# Allegro board stm32f10x.brd
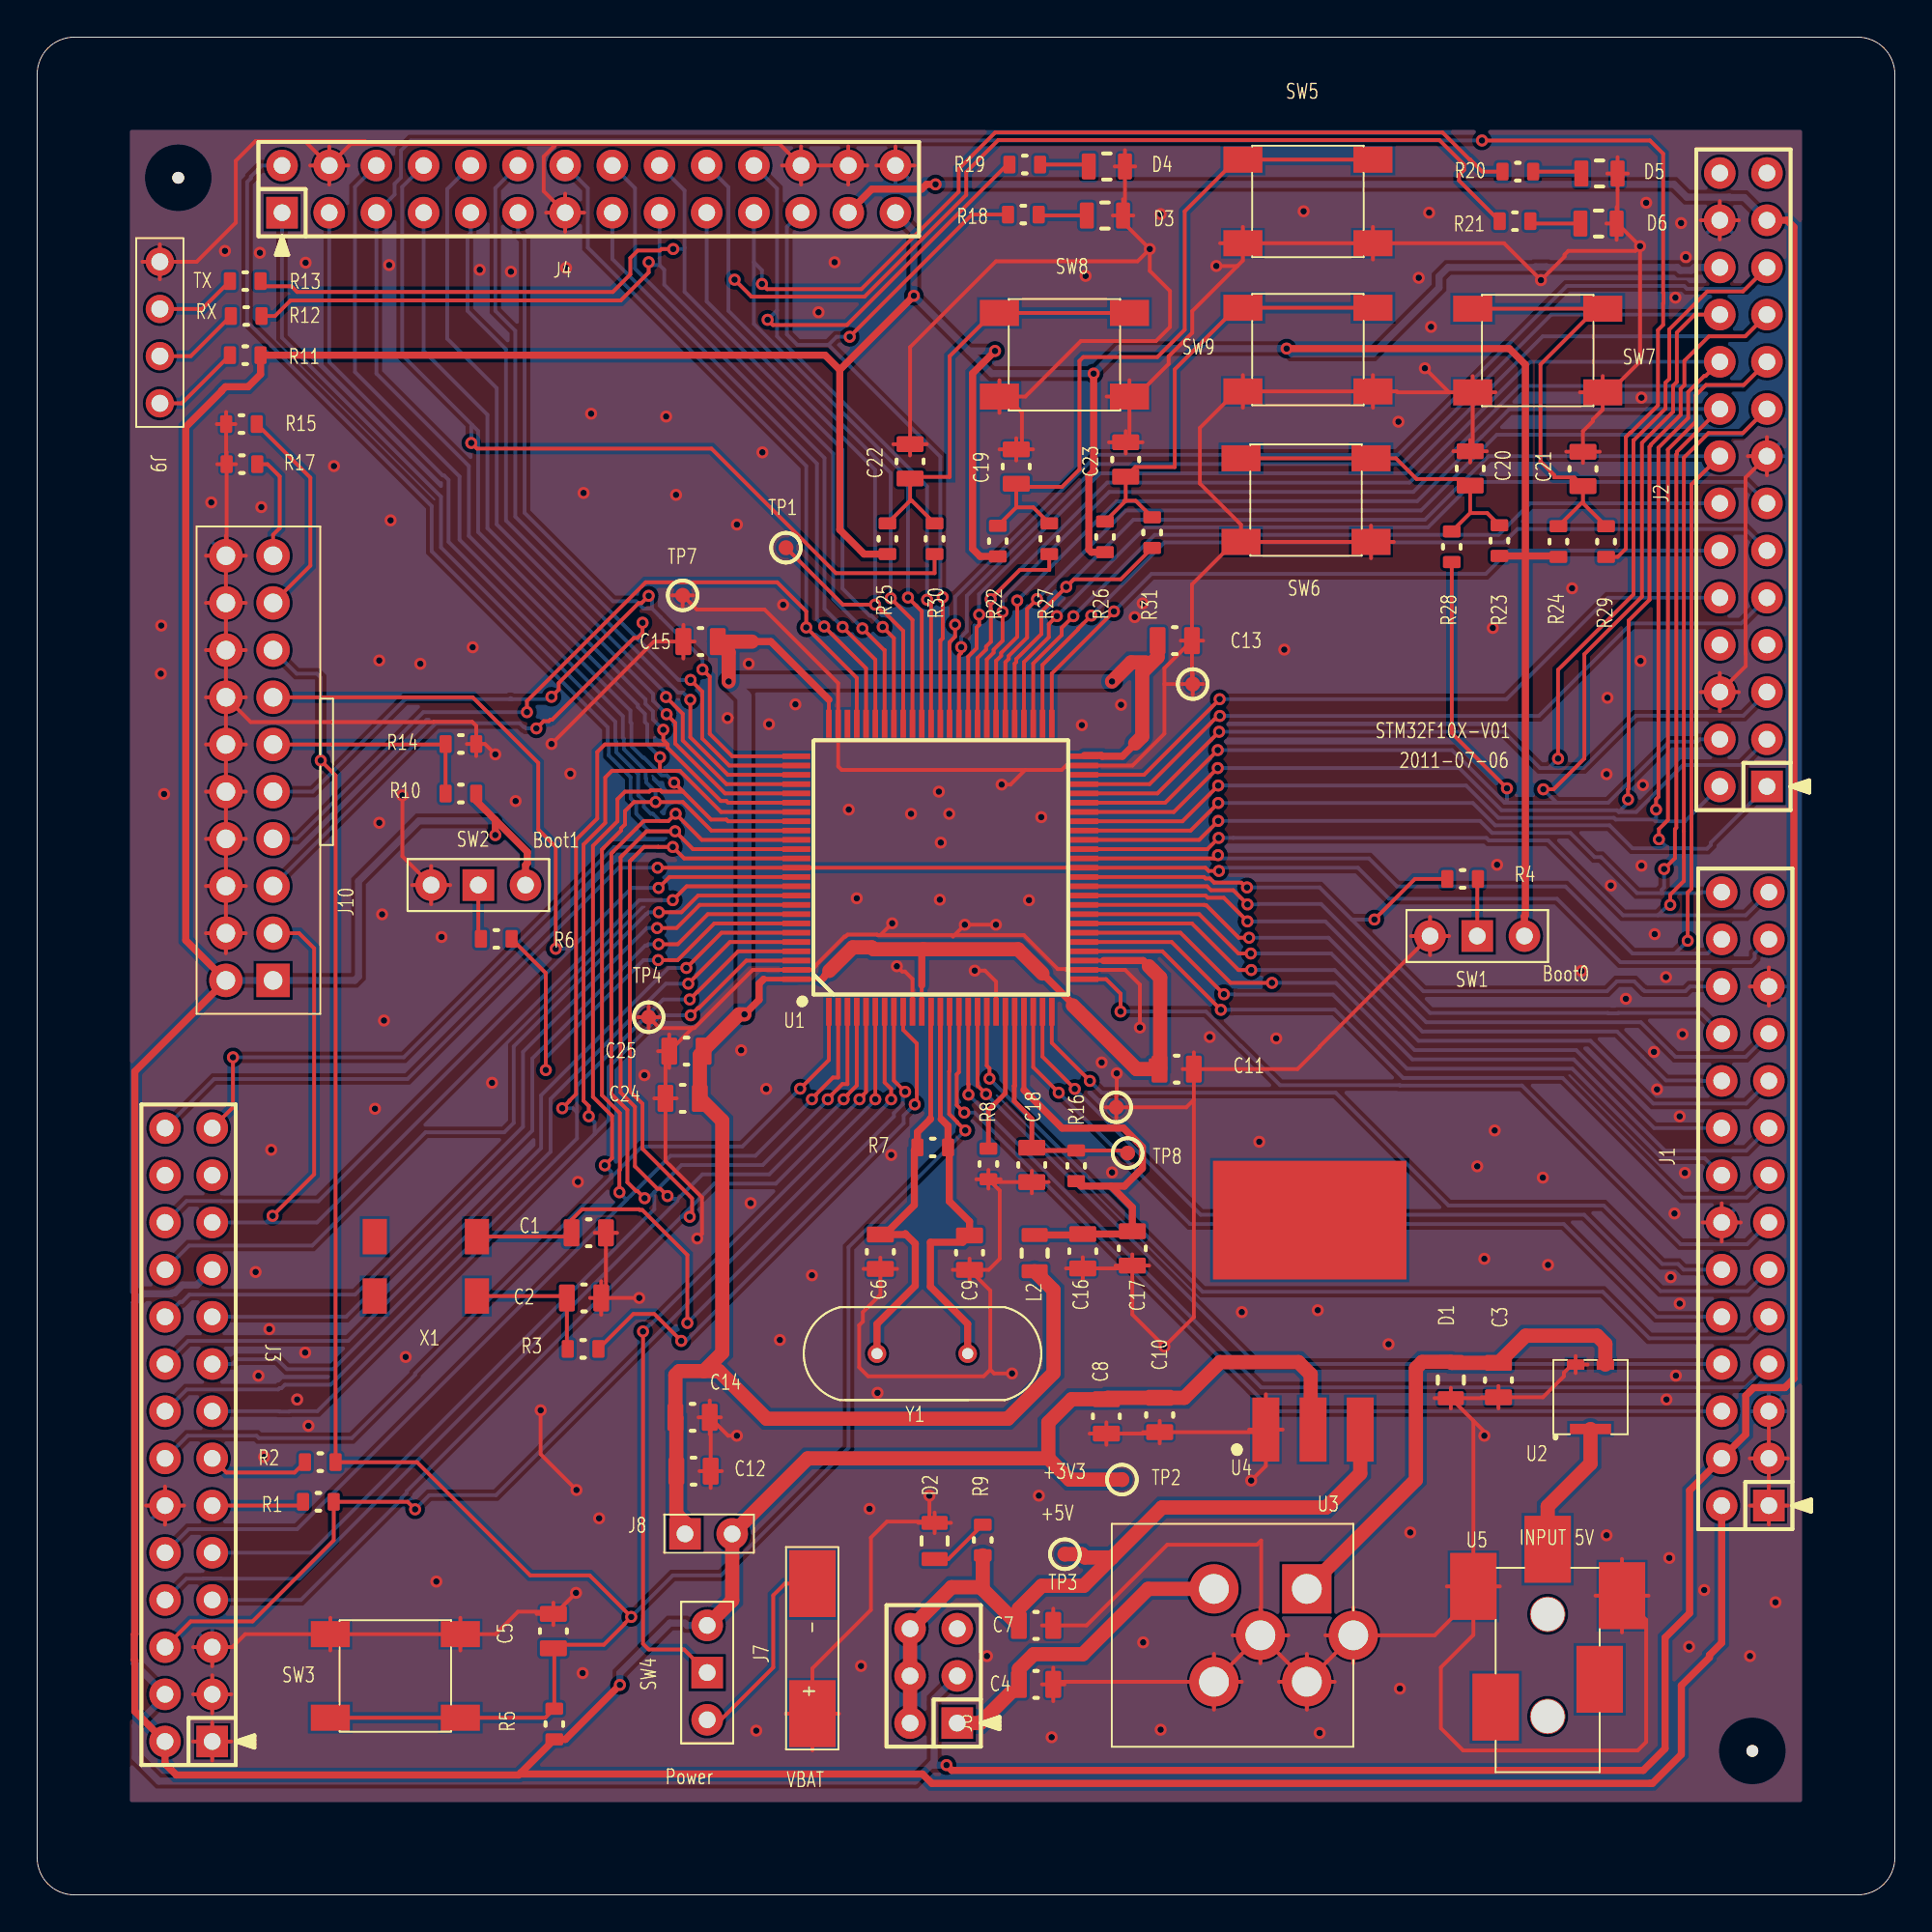
[diagram p0: board, top side]
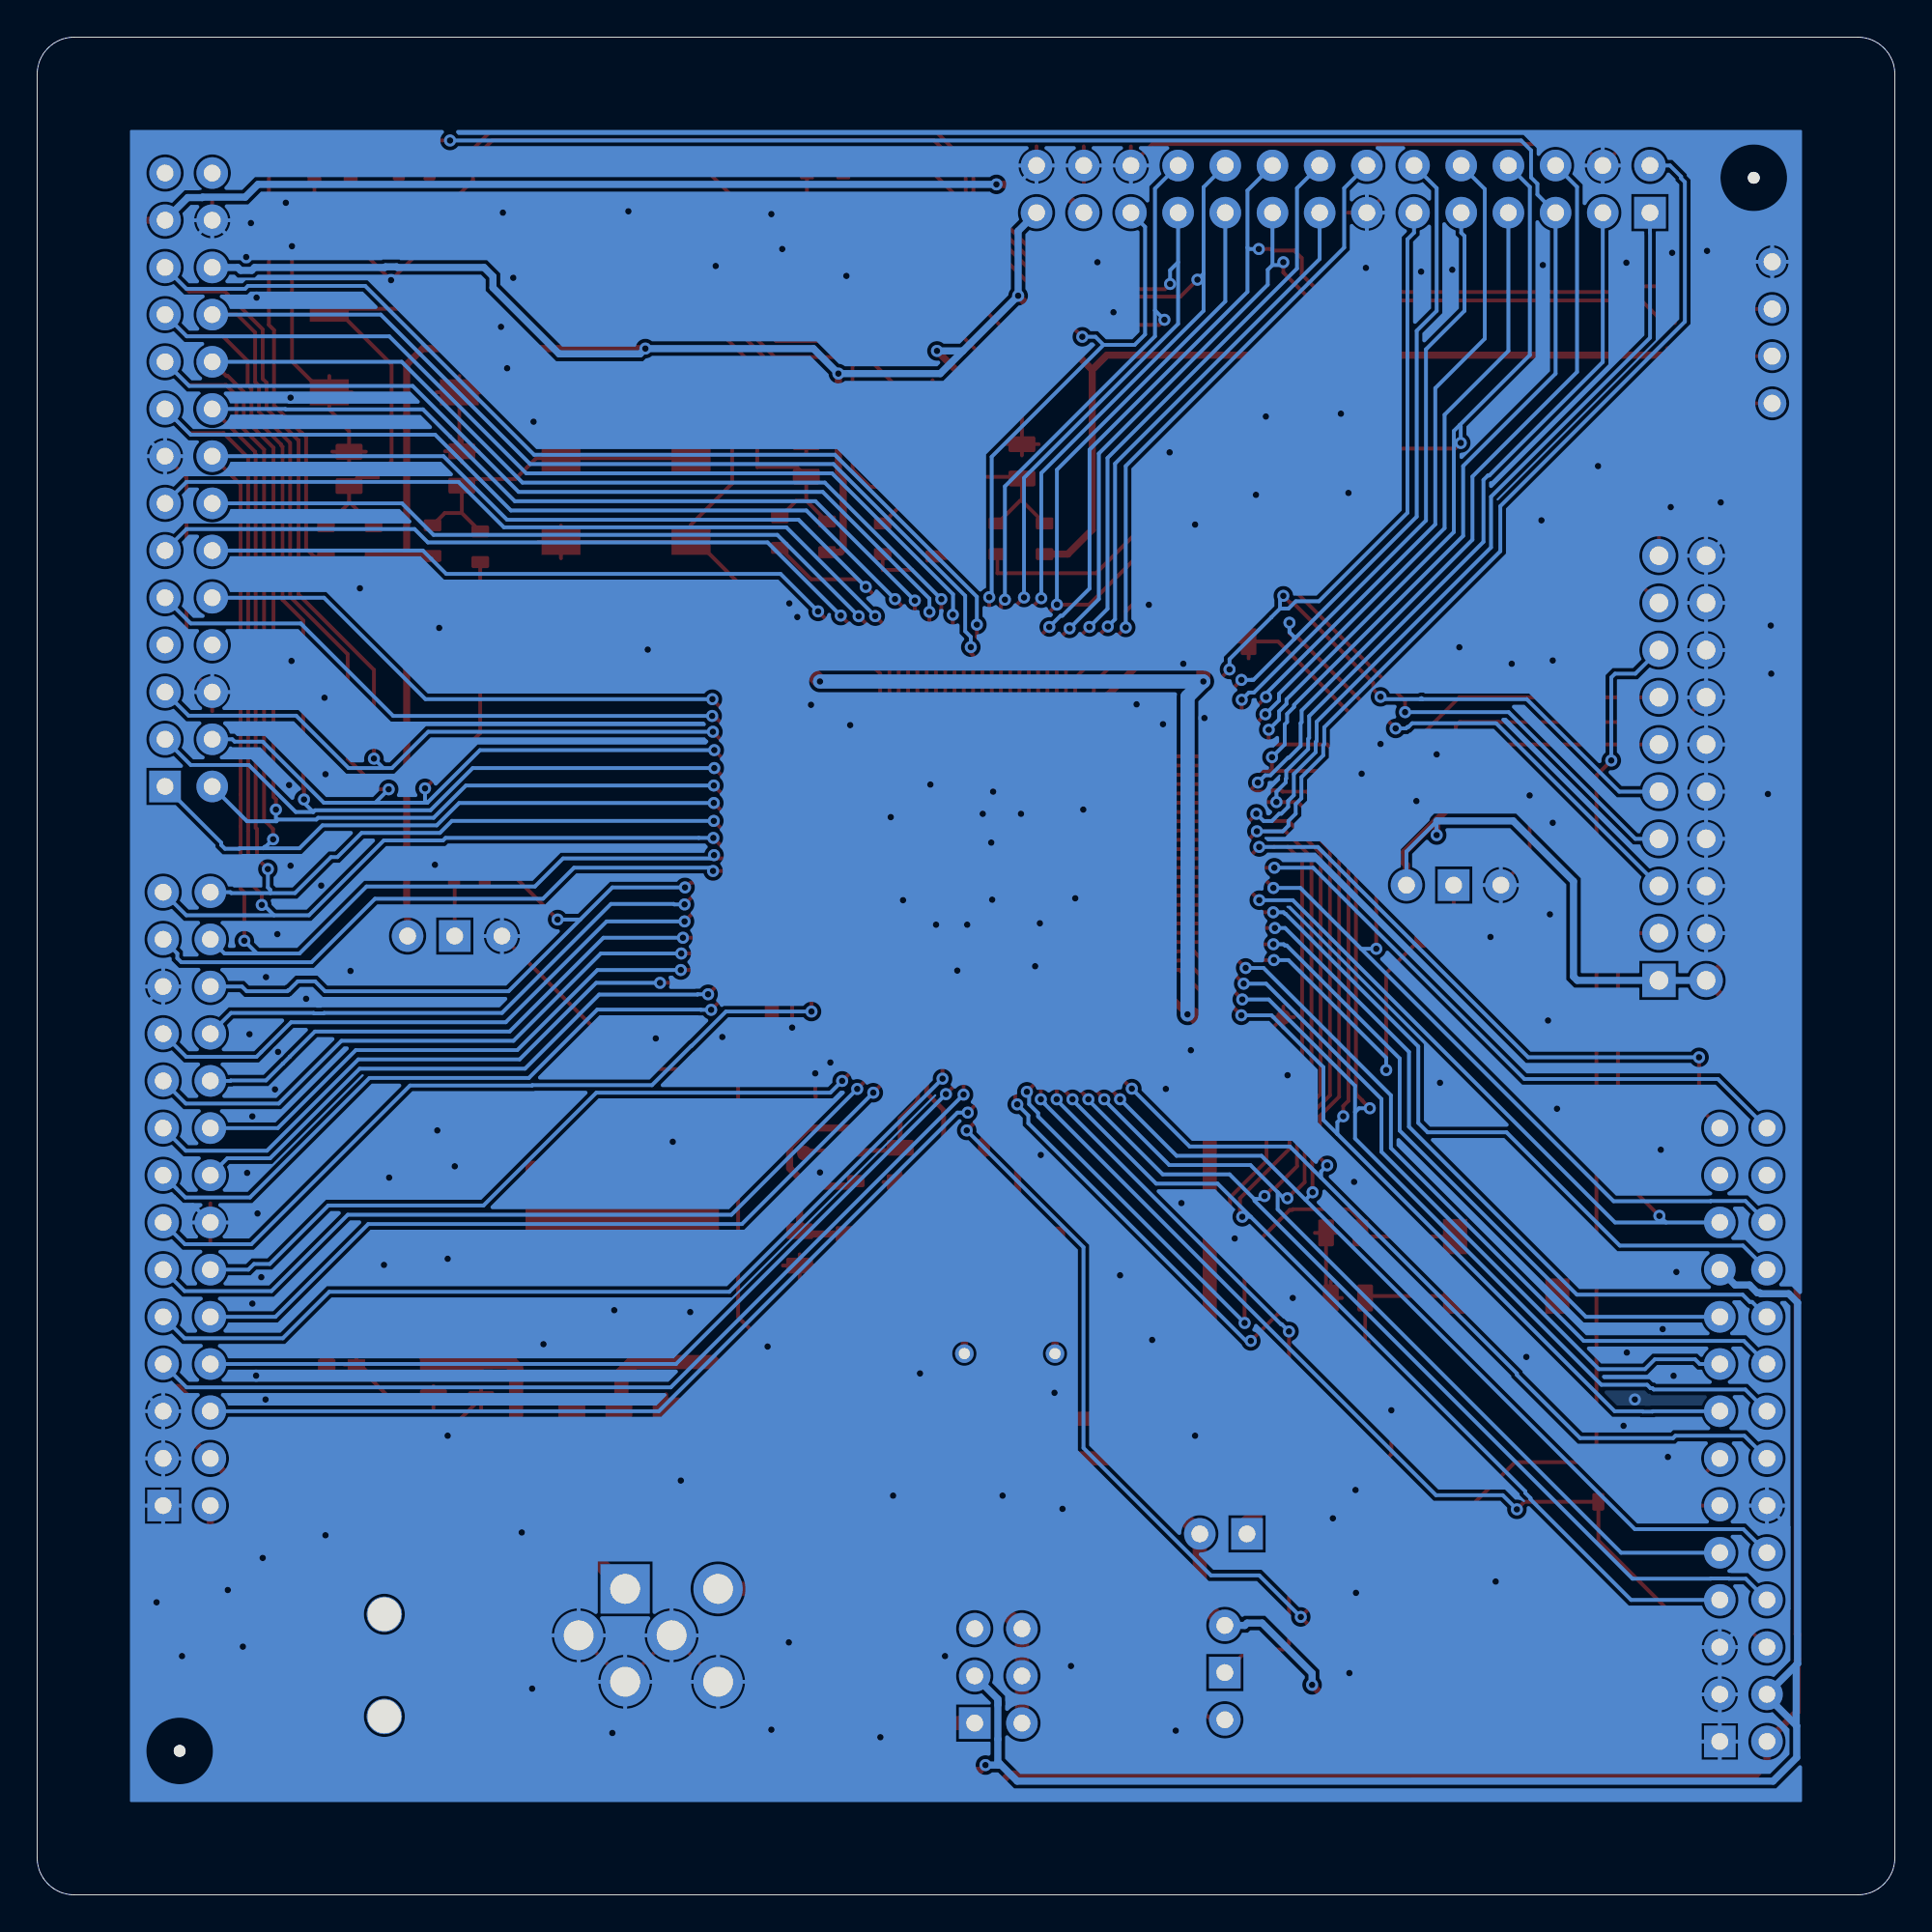
[diagram p1: board, bottom side, seen from below]

Outline 100 x 100 mm; copper layers: TOP, BOTTOM. Coordinates in mm from the lower left corner of the outline.
Outline path: 0,98 0,2 arc(0.59,0.59) 2,0 98,0 arc(99.41,0.59) 100,2 100,98 arc(99.41,99.41) 98,100 2,100 arc(0.59,99.41) 0,98

## Placement (name value [footprint] x y rotation side)
C1  20pF  [C0805]  29.69 35.64 0 top
C2  20pF  [C0805]  29.44 32.13 0 top
C3  100nF  [C0805]  78.66 27.71 90 top
C4  10uF  [C0805]  53.77 11.33 0 top
C5  100nF  [C0805]  27.79 14.2 270 top
C6  20pF  [C0805]  45.39 34.62 90 top
C7  10uF  [C0805]  53.77 14.5 0 top
C8  10uF  [C0805]  57.56 25.76 270 top
C9  20pF  [C0805]  50.19 34.57 90 top
C10  100nF  [C0805]  60.43 25.83 90 top
C11  100nF  [C0805]  61.34 44.45 180 top
C12  100nF  [C0805]  35.33 22.81 180 top
C13  100nF  [C0805]  61.24 67.51 180 top
C14  100nF  [C0805]  35.28 25.7 180 top
C15  100nF  [C0805]  35.71 67.46 0 top
C16  10uF  [C0805]  56.29 34.65 270 top
C17  10nF  [C0805]  58.95 34.8 90 top
C18  10nF  [C0805]  53.54 39.29 90 top
C19  100nF  [C0805]  52.7 76.89 90 top
C20  100nF  [C0805]  77.14 76.78 90 top
C21  100nF  [C0805]  83.21 76.76 90 top
C22  100nF  [C0805]  46.99 77.17 90 top
C23  100nF  [C0805]  58.6 77.27 90 top
C24  100nF  [C0805]  34.75 42.88 0 top
C25  100nF  [C0805]  34.95 45.42 0 top
D1  SMAJ5.0A-TR  [D0805]  76.1 27.71 90 top
D2  F5F1  [D0805]  48.31 19.05 270 top
D3  F5F1  [D0805]  57.48 90.4 180 top
D4  F5F1  [D0805]  57.58 93.04 180 top
D5  F5F1  [D0805]  84.1 92.66 180 top
D6  F5F1  [D0805]  84.05 89.97 180 top
J1  14X2  [HDR254M-2X14]  93.22 20.95 90 top
J2  14X2  [HDR254M-2X14]  93.12 59.66 90 top
J3  14X2  [HDR254M-2X14]  9.42 8.26 90 top
J4  14X2  [HDR254M-2X14]  13.18 90.55 0 top
J6  JUMPER3  [HDR254M_2X3]  49.53 9.25 90 top
J7  BATT SOCKET 2  [BATT]  41.73 9.75 90 top
J8  Jump-2  [JUMP-2]  34.87 19.43 0 top
J9  CON4  [JUMPER4]  6.6 80.29 90 top
J10  CON20A  [TJAG]  12.7 49.23 270 top
L2  CBG201209U12  [B0805]  53.7 34.54 90 top
NOREF  -  [unnamed]  92.33 7.75 0 top
NOREF#2  -  [unnamed]  7.59 92.43 0 top
R1  820  [R0603]  15.14 21.16 180 top
R2  820  [R0603]  15.24 23.29 0 top
R3  0  [R0603]  29.39 29.39 180 top
R4  10K  [R0603]  76.73 54.69 180 top
R5  10K  [R0603]  27.84 9.19 90 top
R6  10K  [R0603]  24.71 51.46 180 top
R7  1M  [R0603]  48.21 40.23 0 top
R8  0  [R0603]  51.21 39.34 270 top
R9  300  [R0603]  50.9 19.1 90 top
R10  R  [R0603]  22.81 59.28 0 top
R11  0  [R0603]  11.2 82.88 180 top
R12  0  [R0603]  11.25 84.99 180 top
R13  0  [R0603]  11.2 86.87 180 top
R14  10K  [R0603]  22.81 61.95 0 top
R15  10K  [R0603]  11 79.17 0 top
R16  47  [R0603]  55.93 39.24 270 top
R17  10K  [R0603]  11.02 77.01 0 top
R18  600  [R0603]  53.09 90.45 0 top
R19  600  [R0603]  53.16 93.14 0 top
R20  600  [R0603]  79.71 92.76 0 top
R21  600  [R0603]  79.55 90.09 0 top
R22  10K  [R0603]  51.71 72.87 90 top
R23  10K  [R0603]  78.71 72.9 90 top
R24  10K  [R0603]  81.89 72.85 90 top
R25  10K  [R0603]  45.77 73 90 top
R26  10K  [R0603]  57.48 73.1 90 top
R27  0  [R0603]  54.48 73 90 top
R28  0  [R0603]  76.15 72.57 90 top
R29  0  [R0603]  84.45 72.85 90 top
R30  0  [R0603]  48.31 73 90 top
R31  0  [R0603]  60.02 73.33 90 top
SW1  BOOT1  [SW3]  80.06 51.61 270 top
SW2  BOOT0  [SW3]  21.21 54.36 90 top
SW3  RESET#  [K6X6_SMD]  16.28 14.78 0 top
SW4  POWER  [SW3]  36.07 9.42 180 top
SW5  UP  [K6X6_SMD]  65.41 94.16 0 top
SW6  DOWN  [K6X6_SMD]  65.3 78.08 0 top
SW7  ENTER  [K6X6_SMD]  77.77 86.13 0 top
SW8  LEFT  [K6X6_SMD]  52.3 85.9 0 top
SW9  RIGHT  [K6X6_SMD]  65.41 86.18 0 top
TP1  TEST POINT  [TP80]  40.31 72.52 0 top
TP2  T POINT S  [TP80]  58.39 22.35 0 top
TP3  T POINT S  [TP80]  55.32 18.34 0 top
TP4  TEST POINT  [TP80]  32.92 47.24 0 top
TP5  TEST POINT  [TP80]  58.09 42.39 0 top
TP6  TEST POINT  [TP80]  62.2 65.18 0 top
TP7  TEST POINT  [TP80]  34.75 69.95 0 top
TP8  T POINT S  [TP80]  58.7 39.93 0 top
U1  STM32F103VBH6  [LQFP100_STM32103VBH6]  40.87 61.29 0 top
U2  ZEN056V130A24LS  [ZEN056V130A24]  83.62 26.8 90 top
U3  BNX002-01  [BNX002]  63.35 13.97 0 top
U4  LD1086D2M33  [DDPAK_2_54P]  68.68 31.39 90 top
U5  DC  [PJK-119]  78.51 6.6 90 top
X1  XM-4  [MC306]  23.67 32.23 180 top
Y1  8MHz (With socket)  [49SS]  50.09 29.13 180 top

## Library data of the parts
C1 C2 C5 C6 C9 C11-C15 C17 C18 C24 C25 = CAP NP: User Part Number: partnum; Tolerance: RichardLC
C3 C10 = CAP NP: User Part Number: partnum; Tolerance: RichardLC; room: Power
C4 C7 C8 = CP: User Part Number: partnum; Tolerance: RichardLC; room: Power
C16 = CAP POL: User Part Number: partnum; Tolerance: RichardLC
C19-C23 = CAP NP: User Part Number: partnum; Tolerance: RichardLC; room: KEYs
D1 = 95SQ015/TO: User Part Number: partnum; Tolerance: RichardLC; room: Power
D2 = F5F1: User Part Number: partnum; Tolerance: RichardLC; room: Power
D3-D6 = F5F1: User Part Number: partnum; Tolerance: RichardLC; room: LEDs
J1-J4 = HEADER 14X2: User Part Number: partnum; Tolerance: RichardLC
J6 = JUMPER3: User Part Number: partnum; Tolerance: RichardLC; room: Power
J7 = CONN SOCKET 2
J8 = Jump-2
J9 = CON4
J10 = CON20A
L2 = BEAD: User Part Number: partnum; Tolerance: RichardLC
R1-R8 R10-R17 = R: User Part Number: partnum; Tolerance: RichardLC
R9 = R: User Part Number: partnum; Tolerance: RichardLC; room: Power
R18-R21 = R: User Part Number: partnum; Tolerance: RichardLC; room: LEDs
R22-R31 = R: User Part Number: partnum; Tolerance: RichardLC; room: KEYs
SW1 SW2 SW4 = SW KEY-SPDT_0
SW3 = SW PUSHBUTTON-SPST-2/SM_1
SW5-SW9 = SW PUSHBUTTON-SPST-2/SM_1: room: KEYs
TP1 TP4-TP7 = TEST POINT
TP2 TP3 = T POINT S: User Part Number: partnum; Tolerance: RichardLC; room: Power
TP8 = T POINT S: User Part Number: partnum; Tolerance: RichardLC
U1 = STM32F103VBH6
U2 = ZEN056V130A24LS: room: Power
U3 = BNX002-01: room: Power
U4 = LD1086D2M33: room: Power
U5 = DC: room: Power
X1 = XM-4
Y1 = ZTA

## Footprints (pads in the part's own frame, mm; a bottom-side part is the same pattern mirrored in y, then rotated)
49SS
  round 1 hole 0.6: 1(0,0) 2(4.88,0)
B0805
  custom 0.75x1.4 smd: 1(-0.975,0) 2(0.975,0)
BATT
  rect 3.6x2.5 smd: 1(0,0) 2(7,0)
BNX002
  rect 2.65x2.65 hole 1.6: 1(5,2.5)
  round 2.65 hole 1.6: 2(5,-2.5) 3(0,2.5) 4(0,-2.5) 5(2.5,0) 6(7.5,0)
C0805
  custom 0.85x1.45 smd: 1(-0.925,0) 2(0.925,0)
D0805
  custom 0.75x1.4 smd: 1(-0.975,0) 2(0.975,0)
DDPAK_2_54P
  rect 6.38x10.41 smd: (4.928,0.178)
  rect 3.45x1.45 smd: 1(-6.35,2.54) 2(-6.35,0) 3(-6.35,-2.54)
HDR254M-2X14
  rect 1.7x1.7 hole 0.9: 1(0,0)
  round 1.7 hole 0.9: 2(0,2.54) 3(2.54,0) 4(2.54,2.54) 5(5.08,0) 6(5.08,2.54) 7(7.62,0) 8(7.62,2.54) 9(10.16,0) 10(10.16,2.54) 11(12.7,0) 12(12.7,2.54) 13(15.24,0) 14(15.24,2.54) 15(17.78,0) 16(17.78,2.54) 17(20.32,0) 18(20.32,2.54) 19(22.86,0) 20(22.86,2.54) 21(25.4,0) 22(25.4,2.54) 23(27.94,0) 24(27.94,2.54) 25(30.48,0) 26(30.48,2.54) 27(33.02,0) 28(33.02,2.54)
HDR254M_2X3
  rect 1.7x1.7 hole 0.9: 1(0,0)
  round 1.7 hole 0.9: 2(0,2.54) 3(2.54,0) 4(2.54,2.54) 5(5.08,0) 6(5.08,2.54)
JUMP-2
  rect 1.7x1.7 hole 0.9: 1(0,0)
  round 1.7 hole 0.9: 2(2.54,0)
JUMPER4
  round 1.524 hole 0.914: 1(0,0) 2(2.54,0) 3(5.08,0) 4(7.62,0)
K6X6_SMD
  rect 2.1x1.4 smd: 1(-0.5,-0.75) 2(6.5,-0.75) 3(-0.5,-5.25) 4(6.5,-5.25)
LQFP100_STM32103VBH6
  rect 0.3x1.5 smd: 1(1.75,-13.75) 2(2.25,-13.75) 3(2.75,-13.75) 4(3.25,-13.75) 5(3.75,-13.75) 6(4.25,-13.75) 7(4.75,-13.75) 8(5.25,-13.75) 9(5.75,-13.75) 10(6.25,-13.75) 11(6.75,-13.75) 12(7.25,-13.75) 13(7.75,-13.75) 14(8.25,-13.75) 15(8.75,-13.75) 16(9.25,-13.75) 17(9.75,-13.75) 18(10.25,-13.75) 19(10.75,-13.75) 20(11.25,-13.75) 21(11.75,-13.75) 22(12.25,-13.75) 23(12.75,-13.75) 24(13.25,-13.75) 25(13.75,-13.75) 51(13.75,1.75) 52(13.25,1.75) 53(12.75,1.75) 54(12.25,1.75) 55(11.75,1.75) 56(11.25,1.75) 57(10.75,1.75) 58(10.25,1.75) 59(9.75,1.75) 60(9.25,1.75) 61(8.75,1.75) 62(8.25,1.75) 63(7.75,1.75) 64(7.25,1.75) 65(6.75,1.75) 66(6.25,1.75) 67(5.75,1.75) 68(5.25,1.75) 69(4.75,1.75) 70(4.25,1.75) 71(3.75,1.75) 72(3.25,1.75) 73(2.75,1.75) 74(2.25,1.75) 75(1.75,1.75)
  rect 1.5x0.3 smd: 26(15.5,-12) 27(15.5,-11.5) 28(15.5,-11) 29(15.5,-10.5) 30(15.5,-10) 31(15.5,-9.5) 32(15.5,-9) 33(15.5,-8.5) 34(15.5,-8) 35(15.5,-7.5) 36(15.5,-7) 37(15.5,-6.5) 38(15.5,-6) 39(15.5,-5.5) 40(15.5,-5) 41(15.5,-4.5) 42(15.5,-4) 43(15.5,-3.5) 44(15.5,-3) 45(15.5,-2.5) 46(15.5,-2) 47(15.5,-1.5) 48(15.5,-1) 49(15.5,-0.5) 50(15.5,0) 76(0,0) 77(0,-0.5) 78(0,-1) 79(0,-1.5) 80(0,-2) 81(0,-2.5) 82(0,-3) 83(0,-3.5) 84(0,-4) 85(0,-4.5) 86(0,-5) 87(0,-5.5) 88(0,-6) 89(0,-6.5) 90(0,-7) 91(0,-7.5) 92(0,-8) 93(0,-8.5) 94(0,-9) 95(0,-9.5) 96(0,-10) 97(0,-10.5) 98(0,-11) 99(0,-11.5) 100(0,-12)
MC306
  rect 1.3x1.9 smd: 1(0,-3.2) 2(5.5,-3.2) 3(5.5,0) 4(0,0)
PJK-119
  round 1.9 hole 1.8 unplated: (3,-2.8) (8.5,-2.8)
  rect 3.6x2.5 smd: (3.5,0) (5,-5.6) 1(12,-2.8) 2(9.5,-6.8) 3(10,1.2)
R0603
  custom 0.65x0.95 smd: 1(-0.825,0) 2(0.825,0)
SW3
  rect 1.7x1.7 hole 0.9: 1(0,-2.54)
  round 1.7 hole 0.9: 2(0,0) 3(0,-5.08)
TJAG
  rect 1.8x1.8 hole 1: 1(0,0)
  round 1.8 hole 1: 2(0,-2.54) 3(-2.54,0) 4(-2.54,-2.54) 5(-5.08,0) 6(-5.08,-2.54) 7(-7.62,0) 8(-7.62,-2.54) 9(-10.16,0) 10(-10.16,-2.54) 11(-12.7,0) 12(-12.7,-2.54) 13(-15.24,0) 14(-15.24,-2.54) 15(-17.78,0) 16(-17.78,-2.54) 17(-20.32,0) 18(-20.32,-2.54) 19(-22.86,0) 20(-22.86,-2.54)
TP80
  round 0.8 smd: 1(0,0)
unnamed
  round 0.635 hole 3.175 unplated: (0,0)
ZEN056V130A24
  rect 0.56x2.21 smd: 1(-1.72,0)
  rect 0.56x0.94 smd: 2(1.75,0.8) 3(1.75,-0.8)

## Nets
+3V3: C8.1 C10.2 J1.2 J2.24 J3.2 J4.27 J8.2 J10.1 J10.2 R5.1 R10.2 R11.1 R22.1 R23.1 R24.1 R25.1 R26.1 SW1.2(S1) SW2.3(S2) SW4.3(S2) TP2.1(TP) U4.2(VOUT)
+5V: C7.1 J6.2 J6.4 J6.6 R9.1 TP3.1(TP) U4.3(VIN)
D5V: J1.4 J2.25 J3.4 J3.21 J4.25 J6.3
GND: C1.2 C2.2 C3.1 C4.2 C5.1 C6.1 C7.2 C8.2 C9.1 C10.1 C11.1 C12.1 C13.1 C14.1 C15.1 C16.2 C17.1 C18.1 C19.2 C20.2 C21.2 C22.2 C23.2 C24.1 C25.1 D1.1(ANODE) D2.1(CATHODE) D3.1(CATHODE) D4.1(CATHODE) D5.1(CATHODE) D6.1(CATHODE) J1.1 J1.3 J1.5 J1.14 J1.23 J2.6 J2.15 J2.26 J3.1 J3.3 J3.5 J3.12 J4.4 J4.13 J4.24 J4.26 J4.28 J7.1 J9.4 J10.4 J10.6 J10.8 J10.10 J10.12 J10.14 J10.16 J10.18 J10.20 R8.2 R14.2 R15.1 R17.1 SW1.3(S2) SW2.2(S1) SW3.1 SW3.2 SW5.3 SW5.4 SW6.3 SW6.4 SW7.3 SW7.4 SW8.3 SW8.4 SW9.3 SW9.4 TP4.1 TP5.1 TP6.1 TP7.1 U1.10(VSS_5) U1.19(VSSA) U1.27(VSS_4) U1.49(VSS_1) U1.74(VSS_2) U1.99(VSS_3) U2.2 U3.2(SG) U3.4(CG1) U3.5(CG2) U3.6(CG3) U4.1(G) U5.2(G#2) U5.3(G#3)
VBAT: SW4.1(COMMON) U1.6(VBAT)
VDD: C11.2 C12.2 C13.2 C14.2 C15.2 C24.2 C25.2 J8.1 L2.1 U1.11(VDD_5) U1.28(VDD_4) U1.50(VDD_1) U1.75(VDD_2) U1.100(VDD_3)
VDDA: C16.1 C17.2 L2.2 R16.2 U1.22(VDDA)
ANTI_TAMPER: J3.6 R1.1 U1.7(PC13-ANTI_TAMP)
AUDIO_PWM: J3.18 U1.95(PB8/TIM4_CH3)
BOOT0: R6.1 U1.94(BOOT0)
CAN_RX: J3.16 J4.8 R30.1 U1.81(PD0) U1.97(PE0/TIM4_ETR)
CAN_TX: J3.15 J4.5 R29.1 U1.82(PD1) U1.98(PE1)
DBGACK: J10.19 R17.2
DBGRQ: J10.17 R15.2
E5V: C4.1 J6.1 U3.3(GV)
IRDA_RX: J4.10 U1.79(PC11)
IRDA_TX: J4.9 U1.78(PC10)
JOY_DOWN: J2.4 J2.22 R28.1 U1.45(PE14) U1.61(PD14)
JOY_SEL: J2.2 J2.20 R27.1 U1.43(PE12) U1.59(PD12)
JOY_UP: J1.26 J2.16 R31.1 U1.39(PE8) U1.55(PD8)
LCD_BACKLIGHT: J4.19 TP1.1 U1.67(PA8/USART1_CK/TIM1_CH1/MCO)
LCD_CLK: J2.11 U1.52(PB13/SPI2_SCK/USART3_CTS/TIM1_C)
LCD_DI: J2.13 U1.54(PB15/SPI2_MOSITIM1_CH3N)
LCD_DO: J2.14 U1.53(PB14/SPI2_MISO/USART3_RTS/TIM1_)
LCD_RS: J1.25 J3.28 U1.38(PE7) U1.88(PD7)
LCD_WR: J2.5 J2.23 U1.46(PE15) U1.62(PD15)
LED1: J4.23 R18.1 U1.63(PC6)
LED2: J4.22 R19.1 U1.64(PC7)
LED3: J4.21 R20.1 U1.65(PC8)
LED4: J4.20 R21.1 U1.66(PC9)
MC_BUSVOLTAGE: J1.13 U1.26(PA3/USART2_RX/ADC_IN3/TIM2_CH4)
MC_CURRENTA/BNC: J1.7 U1.16(PC1/ADC_INI1)
MC_CURRENTB: J1.8 U1.17(PC2/ADC_INI2)
MC_CURRENTC: J1.9 U1.18(PC3/ADC_INI3)
MC_DISSIPATIVEBRAKE: J2.3 J2.21 U1.44(PE13) U1.60(PD13)
MC_ENA/WAKEUP: J1.10 U1.23(PA0-WKUP/USART2_CTS/A DC_IN0/TI)
MC_ENB: J1.11 U1.24(PA1/USART2_RTS/ADC_IN1/TIM2_CH2)
MC_ENINDEX: J1.12 U1.25(PA2/USART2_TX/ADC_IN2/TIM2_CH3)
MC_HEATSINKTEMPERATURE: J1.6 U1.15(PC0/ADC_INI0)
MC_NTC: J1.28 J2.18 U1.41(PE10) U1.57(PD10)
MC_PFCPWM: J1.22 U1.36(PB1/ADC_IN9/TIM3_CH4)
MC_PFCSYNC1: J1.21 U1.35(PB0/ADC_IN8/TIM3_CH3)
MC_PFCSYNC2: J3.14 J4.6 U1.1(PE2) U1.83(PD2/TIM3_ETR)
MC_UH: J1.27 J2.17 U1.40(PE9) U1.56(PD9)
MC_VH: J2.1 J2.19 U1.42(PE11) U1.58(PD11)
MIC_IN: J1.20 U1.34(PC5/ADC_INI5)
MICROSDCARD_CS: J4.7 U1.80(PC12)
OSC_IN: C6.2 R7.1 U1.12(OSC_IN) Y1.2
OSC_OUT: C9.2 R7.2 U1.13(OSC_OUT) Y1.1
PA4: J1.15 U1.29(PA4/SPI1_NSS/U SART2_CK/ADC_IN4)
PA5: J1.16 U1.30(PA5/SPI1_SCK/ADC_IN5)
PA6: J1.17 U1.31(PA6/SPI1_MISO/ADC_IN6/TIM3_CH1)
PA7: J1.18 U1.32(PA7/SPI1_MOSI/ADC_IN7/TIM3_CH2)
PA9: J4.18 R13.1 U1.68(PA9/USART1_TX/T IM1_CH2)
PA10: J4.17 R12.1 U1.69(PA10/USART1_RX/T IM1_CH3)
PA11: J4.16 U1.70(PA11/USART1_CTS/CANRX/USBDM(2)/)
PA12: J4.15 U1.71(PA12/USART1_RTS/CANTX/USBDP(2)/)
PA13: J4.14 J10.7 U1.72(PA13/JTMS-SWDAT)
PA14: J4.11 J10.9 U1.76(PA14/JTCK-SWCLK)
PA15: J4.12 J10.5 U1.77(PA15/JTDI)
PB2: J1.24 R4.2 U1.37(PB2/BOOT1)
PB3: J3.24 J10.13 U1.89(PB3/JTDO)
PB4: J3.23 J10.3 U1.90(PB4/JTRST)
PB5: J3.22 U1.91(PB5/I2C1_SMBAL)
PB6: J3.20 U1.92(PB6/I2C1_SCL/TIM4_CH1)
PB7: J3.19 U1.93(PB7/I2C1_SDA/TIM4_CH2)
PB9: J3.17 U1.96(PB9/TIM4_CH4)
PB10: J2.9 U1.47(PB10/I2C2_SCL/USART3_TX)
PB11: J2.10 U1.48(PB11/I2C2_SDA /USART3_RX)
PB12: J2.12 U1.51(PB12/SPI2_NSS /I2C2_SMBAL/USART)
PC4: J1.19 U1.33(PC4/ADC_INI4)
PC14: C1.1 U1.8(PC14-OSC32_IN) X1.1
PC15: R3.1 U1.9(PC15-OSC32_OUT)
PD3: J3.10 J4.3 U1.2(PE3) U1.84(PD3)
PD4: J3.9 J4.1 U1.3(PE4) U1.85(PD4)
PD5: J3.8 J4.2 U1.4(PE5) U1.86(PD5)
PD6: J3.7 J3.27 U1.5(PE6) U1.87(PD6)
RESET#: C5.2 J10.15 R2.2 R5.2 SW3.3 SW3.4 U1.14(NRST)
RTCK: J10.11 R10.1 R14.1
VREF: C18.2 R16.1 TP8.1(TP) U1.21(VREF+)
VREF-: R8.1 U1.20(VREF-)
N21608: C2.1 R3.2 X1.4
N37923: R4.1 SW1.1(COMMON)
N60209: U2.1 U5.1(V)
N60243: C3.2 D1.2(CATHODE) U2.3 U3.1(SV)
N61865: D2.2(ANODE) R9.2
N62845: J9.1 R11.2
N93685: J3.13 R2.1
N151541: J3.11 R1.2
N161345: R6.2 SW2.1(COMMON)
N162230: J7.2 SW4.2(S1)
N185094: D3.2(ANODE) R18.2
N185098: D4.2(ANODE) R19.2
N185102: D5.2(ANODE) R20.2
N185106: D6.2(ANODE) R21.2
N186030: C19.1 R22.2 R27.2 SW5.1 SW5.2
N186034: C20.1 R23.2 R28.2 SW6.1 SW6.2
N186054: C21.1 R24.2 R29.2 SW7.1 SW7.2
N186058: C22.1 R25.2 R30.2 SW8.1 SW8.2
N186062: C23.1 R26.2 R31.2 SW9.1 SW9.2
N278694: J9.2 R12.2
N278698: J9.3 R13.2

Pads without a net: J2 7 8 27 28; J3 25 26; J6 5; U1 73; X1 2 3

## Via types
v1: diameter 0.65, hole 0.35, TOP to BOTTOM, 299 vias

## Routing (per net, layer and track width the routed paths; a pad name or vN(x,y) marks a point on that pad's centre or on a via; arc(x,y) is an arc through that point)
+3V3: length 448.6
  TOP w0.381: v1(56.87,81.89) 56.87,76.63 56.61,76.37 56.61,72.42 56.76,72.28 R26.1 ; v1(47.19,86.08) 43.21,82.09 ; 43.21,82.09 43.21,73.48 44.51,72.17 R25.1 ; 43.21,82.09 42.42,82.88 R11.1 12.03,81.85 11.35,81.18 10.13,81.18 9.93,80.98 9.93,80.95 8,79.02 8,51.38 J10.2 5.26,44.32 5.26,14.04 5.23,14.02 5.23,12.65 5.26,12.63 5.26,9.88 J3.2 6.88,7.06 7.49,6.45 25.92,6.45 26.05,6.58 ; 80.11,72.07 80.11,52.74 80.06,52.69 SW1.2 ; 80.11,72.07 R23.1 ; 80.11,72.07 80.11,82.37 79.25,83.24 v1(67.26,83.24) ; 80.11,72.07 81.84,72.07 R24.1 ; v1(51.56,83.11) 50.35,81.9 50.35,72.45 50.76,72.05 R22.1 ; 26.05,6.58 R5.1 28.44,8.37 v1(31.37,11.3) ; 26.05,6.58 26.12,6.5 47.66,6.5 48.16,6 86.82,6 86.83,6 86.95,6 88.51,7.56 88.51,11.27 90.02,12.78 90.02,12.9 90.68,13.56 J1.2 ; SW2.3 26.29,55.43 26.39,55.54 26.39,56.13 24.66,57.86 ; 24.66,57.86 v1(24.66,57.05) ; 24.66,57.86 23.63,58.89 R10.2
  TOP w0.762: 54.43,23.5 41.48,23.5 J8.2 37.41,15.85 SW4.3 ; 54.43,23.5 55.58,22.35 TP2.1 ; 54.43,23.5 54.43,25.43 55.69,26.68 C8.1 57.63,26.76 C10.2 61.76,26.76 63.68,28.68 67.89,28.68 68.55,28.02 68.55,25.17 U4.2
  BOTTOM w0.203: SW2.3 26.29,56.16 24.66,57.78 v1(24.66,57.05)
  BOTTOM w0.381: 50.16,83.11 v1(47.19,86.08) 47.19,89.56 J4.27 ; 50.16,83.11 v1(51.56,83.11) ; 50.16,83.11 51.38,81.89 v1(56.87,81.89) 58.22,83.24 v1(67.26,83.24) 67.54,82.95 71.9,82.95 75.46,86.51 75.46,87.12 75.95,87.6 80.62,87.6 80.65,87.64 81.25,87.64 81.28,87.6 88.29,87.6 88.45,87.44 89.05,87.44 89.21,87.6 J2.24 ; J10.2 J10.1 17.09,49.23 17.3,49.43 17.3,54.56 20.55,57.81 24.64,57.81 24.66,57.78 ; SW4.3 34.99,14.5 34.86,14.63 34.06,14.63 31.37,11.94 v1(31.37,11.3)
+5V: length 41.8
  TOP w0.762: 57.86,18.16 56.34,16.64 54.08,16.64 52.85,15.41 C7.1 50.9,16.45 ; 57.86,18.16 56.41,18.16 56.23,18.34 TP3.1 ; 57.86,18.16 60.55,20.85 69.39,20.85 71.22,22.68 U4.3 ; 50.9,16.45 50.79,16.56 49.23,16.56 J6.6 J6.4 J6.2 ; 50.9,16.45 R9.1
D5V: length 261.4
  TOP w0.381: v1(48.95,6.99) 49.24,6.7 86.46,6.7 87.63,7.87 87.63,13.84 88.95,15.16 88.95,21.77 91.97,24.79 91.97,26.87 92.41,27.3 94.08,27.3 94.56,27.79 94.56,89.78 94.2,90.14 J2.25 ; J4.25 44.93,91.82 47.62,91.82 47.87,92.08 v1(48.36,92.08)
  BOTTOM w0.381: J2.25 91.9,91.36 91.12,91.36 91.09,91.39 88.8,91.39 88.11,92.08 v1(48.36,92.08) ; J6.3 48.29,10.54 48.29,10.43 48.27,10.37 48.27,10.28 48.29,10.22 48.29,8.38 48.29,8.38 48.29,7.16 48.18,7.06 ; 5.31,9.12 5.28,9.09 5.28,7.39 6.55,6.12 47.24,6.12 48.18,7.06 ; 5.31,9.12 5.31,12.37 ; 5.31,9.12 6.88,10.69 J3.4 5.31,12.37 ; 5.31,12.37 5.23,12.45 5.23,31.88 5.71,32.36 7.22,32.36 7.27,32.41 7.41,32.41 7.82,32.83 8.6,32.83 J3.21 ; 48.18,7.06 48.26,6.99 v1(48.95,6.99)
GND: length 1180.2
  TOP w0.203: 9.08,56.85 J10.8 ; J10.8 J10.6 ; J10.8 11.24,56.85 ; J10.8 J10.10 ; J10.12 11.24,61.93 ; J10.12 9.08,61.93 ; J10.12 J10.10 ; J10.12 J10.14 ; v1(58.12,44.22) 58.12,43.05 58.09,43.02 TP5.1 ; 30.01,35.64 C1.2 ; C1.2 30.62,32.38 C2.2 ; C1.2 31.22,35.64 ; 10.16,50.69 J10.4 ; J10.4 11.24,51.77 ; J10.4 J10.6 ; J10.4 9.08,51.77 ; C2.2 v1(32.41,32.13) ; C2.2 30.36,31.23 ; C2.2 30.36,33.03 ; C2.2 29.76,32.13 ; 58,93.04 D4.1 ; D4.1 59.11,93.04 ; D4.1 58.56,90.5 D3.1 ; D4.1 58.56,93.92 ; 36.26,25.65 C14.1 ; 36.26,25.65 C12.1 ; 36.26,25.65 37.2,24.71 v1(37.67,24.71) ; C14.1 36.21,26.61 ; C14.1 36.81,25.7 ; C14.1 36.21,24.8 ; C14.1 35.6,25.7 ; SW6.3 64.8,73.76 62.59,75.97 62.59,78.97 64.55,80.93 SW9.3 ; SW6.3 SW6.4 ; SW6.3 64.45,72.83 62.16,70.54 C13.1 ; 17.81,94.25 27.94,94.25 ; 17.81,94.25 17.64,94.41 14.4,94.41 ; 17.81,94.25 16.88,94.25 J4.4 ; 27.94,94.25 39.97,94.25 J4.24 ; 27.94,94.25 27.27,93.57 27.27,91.71 J4.13 ; C6.1 45.39,32.31 44.45,31.37 44.45,30.86 44.25,30.66 44.25,28.4 44.73,27.91 50.95,27.91 51.31,28.27 ; C6.1 44.49,33.7 ; C6.1 46.29,33.7 ; C6.1 45.39,34.3 ; 50.19,33.04 C9.1 ; C9.1 50.19,34.25 ; C9.1 51.22,33.64 51.82,34.24 51.82,37.91 51.36,38.37 ; C9.1 49.29,33.64 ; C9.1 51.31,32.53 51.31,28.27 ; U5.3 77.31,16.05 ; U5.3 77.31,25.52 ; U5.3 78.74,16.6 ; U5.3 75.88,16.6 ; 77.31,16.05 75.23,13.97 U3.6 ; 77.31,16.05 77.31,13.99 75.56,12.24 75.56,8.97 76.76,7.77 86.16,7.77 86.61,8.23 86.61,14.8 U5.2 ; SW2.2 22.24,54.36 ; SW2.2 21.21,53.33 ; SW2.2 19.66,55.91 v1(19.66,59.18) ; SW2.2 21.21,55.38 ; SW2.2 20.18,54.36 ; SW6.4 73.03,72.83 ; SW6.4 71.8,71.95 ; SW6.4 71.8,73.71 ; 33.22,42.88 C24.1 ; C24.1 33.82,45.21 C25.1 ; C24.1 33.82,39.51 35.79,37.54 35.79,35.59 v1(35.53,35.33) ; C24.1 34.42,42.88 ; 34.75,69.37 TP7.1 ; TP7.1 34.17,69.95 ; TP7.1 35.51,69.19 39.15,69.19 43.12,65.23 U1.74 43.12,60.74 43.31,60.55 53.19,60.55 ; TP7.1 35.33,69.95 ; v1(24.66,61.39) 24.1,61.95 R14.2 ; SW7.3 76,80.88 ; SW7.3 77.27,81.76 ; SW7.3 77.27,77.84 C20.2 ; SW7.3 78.5,80.88 ; 76,80.88 v1(74.7,82.18) ; 76,80.88 73.23,80.88 73.18,80.93 SW9.4 ; 53.19,60.55 55.15,60.55 55.39,60.79 U1.49 58.96,60.79 60.68,62.51 60.68,65.18 ; 53.19,60.55 52.4,59.77 v1(51.92,59.77) ; R8.2 51.86,38.52 ; R8.2 51.36,38.37 ; R8.2 51.21,39.02 ; R8.2 50.55,38.52 ; R8.2 51.21,38.02 ; 75.22,26.74 D1.1 ; D1.1 76.1,27.29 ; D1.1 76.1,26.18 ; D1.1 77.31,25.52 ; D1.1 78.61,26.74 C3.1 ; 51.36,38.37 C18.1 ; D6.1 85.06,89.97 v1(86.28,88.75) ; D6.1 85.02,89.09 ; D6.1 85.02,90.84 ; D6.1 84.47,89.97 ; D6.1 85.07,90.02 D5.1 ; J3.12 7.91,20.95 ; J3.12 6.88,21.98 ; J3.12 5.86,20.95 ; J3.12 6.88,19.93 ; v1(86.28,88.75) 86.28,82.54 84.62,80.88 SW7.4 ; v1(86.28,88.75) 86.03,88.49 82.42,88.49 82.22,88.29 82.22,88.19 v1(80.95,86.92) 78.96,88.91 SW5.4 ; 9.7,77.01 R17.1 ; R17.1 10.7,77.01 ; R17.1 10.2,72.12 J10.20 ; R17.1 10.17,77.04 R15.1 ; R17.1 10.2,77.67 ; C3.1 78.66,27.39 ; C3.1 78.66,26.18 ; C3.1 81.06,26.79 82.19,27.92 82.19,28.11 82.63,28.55 U2.2 ; C3.1 77.76,26.79 ; U3.6 70.85,12.47 ; U3.6 69.45,12.57 U3.2 ; U3.6 69.34,13.97 ; U3.6 70.85,15.47 ; U1.10 47.12,49.3 46.72,49.7 46.56,49.7 v1(46.28,49.99) ; 63.35,9.97 U3.4 ; U3.4 64.85,11.47 ; U3.4 63.35,12.97 ; U3.4 U3.5 ; U3.4 54.84,11.47 C4.2 ; C12.1 36.26,21.91 ; C12.1 36.86,22.81 ; C12.1 35.65,22.81 ; 27.79,14.52 C5.1 ; C5.1 27.87,15.12 v1(29.01,16.26) ; C5.1 27.67,15.24 25.88,15.24 24.68,14.03 SW3.2 ; C5.1 26.88,15.12 ; C5.1 27.79,15.73 ; C4.2 55.3,11.33 ; C4.2 54.09,11.33 ; C4.2 54.7,10.43 ; C4.2 54.7,12.23 ; 71.91,80.05 SW9.4 ; SW9.4 SW9.3 ; SW9.4 71.91,81.81 ; 66.84,11.47 U3.2 ; U3.2 U3.5 ; U3.2 68.35,9.97 ; U3.2 69.85,11.47 ; U3.2 68.35,12.97 ; C23.2 58.6,78.79 ; C23.2 57.7,78.19 ; C23.2 58.6,77.59 ; C23.2 58.8,78.39 SW8.4 ; C23.2 59.5,78.19 ; U4.1 66.14,26.95 ; U4.1 67.04,25.04 ; U4.1 66.14,23.09 v1(65.35,22.3) ; U4.1 65.24,25.04 ; U4.1 66,24.91 C10.1 ; U3.5 65.85,15.47 ; U3.5 65.85,12.47 ; U3.5 65.89,14.01 65.89,19.08 65.66,18.85 60.83,18.85 56.49,14.5 C7.2 ; U3.5 64.34,13.97 ; U3.5 67.35,13.97 ; C20.2 78.04,77.71 ; C20.2 77.14,77.11 ; C20.2 77.14,78.31 ; C20.2 76.24,77.71 ; U2.2 82.82,29 ; U2.2 82.82,28.09 ; U2.2 83.46,28.55 ; SW9.3 64.91,81.81 ; SW9.3 64.91,80.05 ; 33.42,45.42 C25.1 ; C25.1 34.04,45.42 35.28,46.66 ; C25.1 34.03,46.32 ; C25.1 34.03,44.51 ; 52.7,77.21 C19.2 ; C19.2 53.61,77.81 ; C19.2 52.7,78.41 ; C19.2 51.8,77.81 ; C19.2 53.01,78.12 53.01,79.79 52.15,80.65 ; 9.08,72.09 J10.20 ; J10.20 11.24,72.09 ; J10.20 J10.18 ; J10.20 10.16,73.16 ; 64.61,87.68 64.91,87.98 SW5.3 ; 64.61,87.68 v1(63.47,87.68) ; 64.61,87.68 62.18,85.25 62.18,84.08 60.91,82.81 60.91,82.41 59.15,80.65 SW8.4 ; C11.1 62.27,45.35 ; C11.1 67.84,44.45 69.04,45.64 69.04,45.67 SW1.3 ; C11.1 62.27,42.8 ; C11.1 61.66,44.45 ; C10.1 60.43,24.3 ; C10.1 60.43,25.51 ; C10.1 60.35,24.83 C8.2 ; C10.1 59.52,24.91 ; C15.1 34.79,68.37 ; C15.1 34.79,66.56 ; C15.1 33.2,67.46 v1(27.69,61.95) ; C15.1 35.39,67.46 ; 56.65,24.83 C8.2 ; C8.2 57.56,25.43 ; C8.2 57.56,24.23 ; J9.4 6.6,88.85 ; J9.4 6.6,86.97 ; J9.4 5.66,87.91 ; J9.4 8.59,87.91 10.69,90.02 10.69,93.34 11.76,94.41 14.4,94.41 ; 84.52,92.66 D5.1 ; D5.1 85.07,93.54 ; D5.1 85.63,92.66 ; 83.88,16.1 U5.2 ; U5.2 85.31,14.13 ; U5.2 85.31,18.08 ; U5.2 86.74,16.1 ; SW3.1 SW3.2 ; SW3.1 15.78,13.15 ; SW3.1 15.78,14.91 ; SW3.1 11.2,14.03 10.5,13.34 J3.5 ; SW3.2 22.78,14.91 ; SW3.2 22.78,13.15 ; C18.1 54.45,38.37 ; C18.1 53.54,37.77 ; C18.1 53.54,38.97 ; 23.63,61.3 R14.2 ; R14.2 23.13,61.95 ; R14.2 23.63,62.93 23.42,63.14 21.35,63.14 21.34,63.13 11.5,63.13 J10.14 ; 48.24,20.09 45.75,20.09 44.88,19.23 44.88,15.34 41.73,12.19 J7.1 ; 48.24,20.09 48.03,20.3 v1(48.03,21.49) ; 48.24,20.09 D2.1 ; 51.31,28.27 51.51,28.07 v1(52.48,28.07) ; J4.13 28.42,91.58 ; J4.13 29.45,90.55 ; J4.13 27.39,90.55 ; J4.13 28.42,89.52 ; 56.29,33.12 C16.2 ; C16.2 58.8,33.72 C17.1 ; C16.2 56.29,34.32 ; C16.2 55.38,33.72 ; J2.26 90.58,91.17 ; J2.26 89.55,90.14 ; J2.26 91.6,90.14 ; J2.26 90.58,89.12 ; 60.68,65.18 TP6.1 ; 60.68,65.18 60.68,66.03 C13.1 ; 92.19,23.5 93.22,23.5 ; 93.22,23.5 94.25,23.5 ; 93.22,23.5 93.22,26.04 ; 93.22,23.5 J1.1 ; v1(59.89,88.6) 58.46,90.03 D3.1 ; v1(59.89,88.6) 59.23,87.93 51.61,87.93 46.99,83.31 C22.2 ; v1(59.89,88.6) 59.89,87.42 60.98,86.33 60.98,84.4 60.22,83.64 56.18,83.64 53.2,80.65 52.15,80.65 ; 35.28,46.66 35.38,46.66 38.51,49.79 U1.99 41.7,49.79 41.92,50.01 41.92,50.05 43.46,51.59 43.52,51.59 43.62,51.69 45.21,51.69 45.24,51.66 45.39,51.66 ; 35.28,46.66 33.5,46.66 TP4.1 ; SW8.3 51.8,81.53 ; SW8.3 52.15,80.65 ; SW8.3 51.8,79.77 ; 92.19,20.95 J1.1 ; J1.1 93.22,19.93 ; J1.1 94.25,20.95 ; TP4.1 32.92,47.82 ; TP4.1 32.92,46.67 ; TP4.1 32.34,47.24 ; TP4.1 33.5,47.24 ; 46.09,78.09 C22.2 ; C22.2 46.99,77.49 ; C22.2 47.89,78.09 ; 14.4,94.41 J4.4 ; J10.14 11.24,64.47 ; J10.14 9.08,64.47 ; J10.14 J10.16 ; 15.72,92.06 J4.4 ; J4.4 15.72,94.12 ; J4.4 16.75,93.09 ; J4.4 14.69,93.09 ; J10.6 9.08,54.31 ; J10.6 11.24,54.31 ; SW7.4 84.27,79.95 83.74,79.42 83.74,79.32 83.21,78.79 C21.2 ; SW7.4 84.27,81.76 ; SW7.4 83.05,80.88 ; C17.1 58.95,31.24 v1(60.68,29.51) 62.27,31.1 62.27,42.8 ; C17.1 58.95,34.48 ; C17.1 58.05,33.87 ; C17.1 59.86,33.87 ; 90.68,35.17 J1.14 ; J1.14 89.65,36.2 ; J1.14 91.71,36.2 ; J1.14 90.68,37.22 ; 48.31,19.47 D2.1 ; D2.1 48.31,20.58 ; D2.1 47.43,20.03 ; D2.1 49.19,20.03 ; J2.6 91.97,66.14 91.97,66.79 91.96,66.81 91.96,76.29 J2.15 ; J2.6 90.58,63.72 ; J2.6 89.55,64.74 ; J2.6 90.58,65.77 ; J2.6 91.6,64.74 ; 92.19,48.9 93.22,48.9 ; 93.22,48.9 93.22,49.92 ; 93.22,48.9 93.22,47.87 ; J4.28 47.23,93.09 ; J4.28 46.2,94.12 ; J4.28 45.17,93.09 ; 82.31,77.68 C21.2 ; C21.2 83.21,77.08 ; C21.2 84.11,77.68 ; J3.1 9.42,9.28 ; J3.1 9.42,7.23 ; J3.1 10.45,8.26 ; J3.1 8.4,8.26 ; 57.57,80.65 SW8.4 ; SW8.4 58.8,81.53 ; TP6.1 62.16,65.22 C13.1 ; TP6.1 62.2,64.6 ; TP6.1 62.2,65.75 ; TP6.1 62.78,65.18 ; J4.24 41.12,94.12 ; J4.24 41.12,92.06 ; J4.24 40.09,93.09 ; J4.24 J4.26 ; C13.1 62.77,67.51 ; C13.1 61.56,67.51 ; J4.26 44.69,93.09 ; J4.26 43.66,92.06 ; J4.26 43.66,94.12 ; D3.1 59.01,90.4 ; D3.1 57.9,90.4 ; D3.1 58.46,91.28 ; 71.91,88.03 SW5.4 ; SW5.4 SW5.3 ; SW5.4 71.91,89.79 ; TP5.1 58.09,41.81 ; TP5.1 57.51,42.39 ; TP5.1 61.86,42.39 62.27,42.8 ; 77.31,25.52 77.9,24.93 v1(77.9,24.71) ; J10.16 J10.18 ; J10.16 11.24,67.01 ; J10.16 9.08,67.01 ; J10.18 9.08,69.55 ; J10.18 11.24,69.55 ; 49.38,51.66 53.11,51.66 54.94,49.84 55.34,49.84 55.39,49.79 U1.27 58.57,49.79 59.36,49 v1(59.36,46.69) ; 49.38,51.66 49.3,51.59 49.23,51.66 45.39,51.66 ; 49.38,51.66 v1(49.94,52.22) v1(51.61,52.22) ; v1(29.03,21.79) 27.1,23.72 v1(27.1,26.09) ; 93.12,76.42 J2.15 ; J2.15 92.09,77.44 ; J2.15 93.12,78.47 ; SW1.3 74.98,52.64 ; SW1.3 73.95,51.61 ; SW1.3 74.98,50.58 ; SW1.3 76.01,51.61 ; 9.42,12.31 J3.5 ; J3.5 8.4,13.34 ; U1.19 51.62,49.16 51.02,49.75 v1(50.47,49.75) ; 45.39,51.66 v1(46.02,52.3) ; C7.2 54.7,15.41 ; C7.2 54.09,14.5 ; SW5.3 63.68,88.91 ; SW5.3 64.91,89.79 ; 40.3,9.75 J7.1 ; J7.1 43.16,9.75 ; J7.1 41.73,7.78 ; J10.10 11.24,59.39 ; J10.10 9.08,59.39 ; 9.67,79.17 R15.1 ; R15.1 10.68,79.17 ; R15.1 10.17,79.82 ; J3.3 9.42,11.82 ; J3.3 10.45,10.79 ; J3.3 9.42,9.77 ; J3.3 8.4,10.79
  BOTTOM w0.203: 93.12,76.42 J2.15 ; J2.15 94.27,78.6 94.27,88.08 93.59,88.76 91.96,88.76 J2.26 ; J2.15 94.14,77.44 ; J2.15 93.12,78.47 ; J2.15 92.09,77.44 ; J3.5 J3.3 ; J3.5 8.4,13.34 ; J3.5 8,14.76 7.4,14.76 7.36,14.72 6.4,14.72 5.73,15.4 5.73,19.8 J3.12 ; J3.5 9.42,14.36 ; J3.5 10.45,13.34 ; J3.3 10.45,10.79 ; J3.3 8.4,10.79 ; J3.3 J3.1 ; 9.08,72.09 J10.20 ; J10.20 11.24,72.09 ; J10.20 5.94,76.3 5.94,78 5.28,78.66 5.28,87.58 5.61,87.91 J9.4 ; J10.20 10.16,71.01 ; J10.20 10.16,73.16 ; J1.1 93.22,21.98 ; J1.1 93.22,19.28 92.18,18.24 90.47,18.24 86.11,22.61 80.01,22.61 v1(77.9,24.71) ; J1.1 94.25,20.95 ; J1.1 92.19,20.95 ; v1(46.02,52.3) 46.02,51.89 46.28,51.64 v1(46.28,49.99) ; 10.16,60.85 J10.12 ; J10.12 10.16,63 ; J10.12 11.24,61.93 ; J10.12 9.08,61.93 ; J3.12 6.88,21.98 ; J3.12 7.91,20.95 ; J3.12 5.86,20.95 ; J3.12 6.88,19.93 ; U3.5 67.35,13.97 ; U3.5 65.85,21.81 v1(65.35,22.3) 60.68,26.97 v1(60.68,29.51) 53.92,29.51 v1(52.48,28.07) 52.48,25.93 v1(48.03,21.49) ; U3.5 64.34,13.97 ; U3.5 65.85,12.47 ; 15.72,92.06 J4.4 ; J4.4 15.72,94.12 ; J4.4 16.75,93.09 ; J4.4 14.69,93.09 ; 29.03,21.95 v1(29.03,21.79) ; 29.03,21.95 31.34,24.26 37.21,24.26 v1(37.67,24.71) ; 29.03,21.95 29.01,21.92 v1(29.01,16.26) ; 90.58,89.12 J2.26 ; J2.26 89.55,90.14 ; J2.26 91.6,90.14 ; J2.26 89.23,88.79 88.49,88.79 88.44,88.75 v1(86.28,88.75) ; 41.12,92.06 J4.24 ; J4.24 40.09,93.09 ; J4.24 J4.26 J4.28 ; J10.8 11.24,56.85 ; J10.8 9.08,56.85 ; J10.8 10.16,55.77 ; J10.8 10.16,57.92 ; v1(80.95,86.92) 76.21,82.18 v1(74.7,82.18) ; J1.14 91.71,36.2 ; J1.14 91.62,37.13 92.19,37.13 92.64,37.58 93.7,37.58 94.37,38.26 ; J1.14 89.65,36.2 ; 92.19,48.9 93.22,48.9 ; 93.22,48.9 93.22,47.87 ; 93.22,48.9 93.22,49.92 ; 93.22,48.9 94.25,48.9 ; 93.22,48.9 94.37,47.74 94.37,38.26 ; 21.21,53.33 SW2.2 ; SW2.2 20.18,54.36 ; SW2.2 22.24,54.36 ; SW2.2 21.21,55.38 ; J10.18 11.24,69.55 ; J10.18 10.16,68.47 ; J10.18 10.16,70.62 ; J10.18 9.08,69.55 ; 9.08,54.31 J10.6 ; J10.6 10.16,53.23 ; J10.6 10.16,55.38 ; J10.6 11.24,54.31 ; J10.4 11.24,51.77 ; J10.4 10.16,52.84 ; J10.4 10.16,50.69 ; J10.4 9.08,51.77 ; SW1.3 74.98,52.64 ; SW1.3 73.95,51.61 ; SW1.3 76.01,51.61 ; SW1.3 74.98,50.58 ; 8.4,8.26 J3.1 ; J3.1 10.45,8.26 ; J3.1 9.42,7.23 ; 61.84,11.47 U3.4 ; U3.4 64.85,11.47 ; U3.4 63.35,12.97 ; U3.4 63.35,9.97 ; J4.28 48.11,91.19 48.11,90.98 50.55,88.54 59.84,88.54 v1(59.89,88.6) 62.56,88.6 v1(63.47,87.68) ; J4.28 46.2,92.06 ; J4.28 47.23,93.09 ; 10.16,63.39 J10.14 ; J10.14 10.16,65.54 ; J10.14 9.08,64.47 ; J10.14 11.24,64.47 ; 94.37,38.26 94.37,27.19 93.22,26.04 ; J2.6 91.6,64.74 ; J2.6 89.55,64.74 ; J2.6 90.58,65.77 ; 93.22,22.47 93.22,23.5 ; 93.22,23.5 94.25,23.5 ; 93.22,23.5 93.22,24.52 ; 93.22,23.5 92.19,23.5 ; v1(49.94,52.22) 50.55,51.61 50.55,50.38 50.47,50.31 v1(50.47,49.75) ; J9.4 7.54,87.91 ; J9.4 6.6,88.85 ; J9.4 6.6,86.97 ; v1(51.92,59.77) 51.61,59.46 v1(51.61,52.22) ; J10.10 11.24,59.39 ; J10.10 10.16,60.46 ; J10.10 9.08,59.39 ; J10.10 10.16,58.31 ; J4.13 28.42,91.58 ; J4.13 28.42,89.52 ; J4.13 27.39,90.55 ; 93.22,26.04 94.25,26.04 ; 93.22,26.04 93.22,27.06 ; 93.22,26.04 92.19,26.04 ; 93.22,26.04 93.22,25.01 ; v1(59.36,46.69) 59.36,45.47 v1(58.12,44.22) ; U3.6 70.85,15.47 ; U3.6 70.85,12.47 ; U3.6 72.35,13.97 ; U3.6 69.34,13.97 ; U3.2 68.35,12.97 ; U3.2 68.35,9.97 ; U3.2 66.84,11.47 ; U3.2 69.85,11.47 ; J10.16 11.24,67.01 ; J10.16 9.08,67.01 ; J10.16 10.16,65.93 ; J10.16 10.16,68.08 ; v1(27.1,26.09) 32.41,31.39 v1(32.41,32.13) 35.25,34.97 35.25,35.05 v1(35.53,35.33) ; v1(19.66,59.18) 21.87,61.39 v1(24.66,61.39) 25.22,61.95 v1(27.69,61.95)
  vias: v1(6.68,68.33) v1(6.65,65.74) v1(6.83,59.26) v1(9.37,74.96) v1(10.11,88.49) v1(11.76,33.53) v1(11.91,27.94) v1(11.99,88.39) v1(12.06,74.7) v1(12.22,23.57) v1(12.5,30.45) v1(12.6,40.11) v1(14,26.66) v1(14.43,29.19) v1(14.45,87.86) v1(14.61,25.25) v1(15.98,76.91) v1(18.19,42.32) v1(18.41,66.45) v1(18.41,57.71) v1(18.57,52.78) v1(18.67,47.07) v1(18.95,87.73) v1(19.02,73.99) v1(19.84,28.96) v1(20.62,66.27) v1(21.49,16.87) v1(21.77,51.56) v1(23.44,67.16) v1(23.83,87.48) v1(24.49,43.71) v1(25.5,87.38) v1(25.76,58.88) v1(28.47,87.58) v1(28.7,60.35) v1(29.11,38.38) v1(29.41,75.46) v1(29.36,11.94) v1(29.82,79.73) v1(30.25,20.27) v1(32.69,44.12) v1(33.86,79.58) v1(34.39,75.36) v1(37.17,63.35) v1(37.67,73.76) v1(37.9,45.47) v1(38.3,66.27) v1(38.4,37.24) v1(38.71,8.84) v1(39.04,77.65) v1(39.24,43.38) v1(39.4,63.02) v1(39.98,29.87) v1(40.16,69.44) v1(40.82,64.08) v1(41.71,33.35) v1(42.06,85.19) v1(42.93,87.88) v1(43.69,58.42) v1(44.12,53.64) v1(44.35,12.32) v1(44.81,20.78) v1(45.24,27.03) v1(45.97,39.83) v1(47.04,58.19) v1(48.54,59.39) v1(48.64,56.64) v1(48.59,53.57) v1(49.1,58.19) v1(51.13,12.85) v1(53.39,53.54) v1(53.92,21.49) v1(54.05,58.01) v1(54.61,8.48) v1(56.24,62.97) v1(56.44,87.15) v1(57.3,44.81) v1(57.86,38.89) v1(58.34,64.06) v1(59.08,68.78) v1(59.51,69.52) v1(59.54,13.59) v1(60.48,90.47) v1(60.48,8.89) v1(63.12,46.18) v1(64.85,31.37) v1(65.79,40.54) v1(66.7,46.1) v1(67.13,67.03) v1(68.17,90.63) v1(68.94,31.47) v1(69.04,8.71) v1(72.75,29.64) v1(73.28,79.3) v1(73.36,11.1) v1(73.91,19.51) v1(74.37,87.05) v1(74.93,90.55) v1(75.03,84.4) v1(77.52,39.22) v1(77.9,34.24) v1(78.36,68.2) v1(78.46,41.15) v1(78.59,55.45) v1(81.05,38.61) v1(81.33,33.91) v1(82.63,70.33) v1(83.13,49.73) v1(84.53,64.44) v1(84.48,60.33) v1(84.48,19.35) v1(84.71,54.33) v1(85.52,48.23) v1(86.31,66.42) v1(86.36,80.59) v1(86.44,59.74) v1(86.36,55.4) v1(86.61,91.08) v1(87.03,45.38) v1(87.07,51.71) v1(87.2,43.36) v1(87.68,49.4) v1(87.71,26.66) v1(87.93,33.25) v1(87.86,18.14) v1(88.14,36.68) v1(88.19,85.98) v1(88.21,27.95) v1(88.42,41.9) v1(88.42,31.83) v1(88.49,89.99) v1(88.57,46.33) v1(88.75,88.16) v1(88.7,38.86) v1(88.93,13.36) v1(89.74,16.41) v1(92.2,12.85) v1(93.57,15.75)
VBAT: length 43.3
  TOP w0.203: v1(32.61,30.33) 32.61,13.51 32.92,13.21 34.82,13.21 SW4.1 ; U1.6 v1(45.12,42.82)
  BOTTOM w0.203: v1(32.61,30.33) 33.01,30.72 33.05,30.72 45.12,42.79 v1(45.12,42.82)
VDD: length 183
  TOP w0.203: 60.19,44.68 59.94,44.68 59.94,44.92 60.19,44.68 ; 60.19,44.68 C11.2 ; 59.49,62.36 59.66,62.53 59.66,66.34 ; 57.4,50.29 U1.28 ; 42.62,64.34 U1.75 ; 57.33,61.29 U1.50 ; U1.100 42.19,49.29 42.64,49.74 ; 47.62,48.96 U1.11
  TOP w0.254: 39.1,49.29 U1.100
  TOP w0.381: 42.64,49.74 42.42,49.51 42.4,49.46 42.34,49.38 42.27,49.31 42.21,49.27 ; 47.62,48.96 47.62,50.82 47.7,50.9 ; 59.11,61.98 58.42,61.29 57.33,61.29 57.28,61.33 56.37,61.33 ; 54.11,49.59 55.75,47.96 55.75,47.88 ; 42.62,64.34 39.49,67.46 38.48,67.46 ; 39.1,49.29 38.86,49.05 38.86,48.18 v1(38.07,47.4) ; 57.4,50.29 59.54,50.29 59.84,49.99
  TOP w0.762: J8.1 34.87,20.03 34.41,20.5 C12.2 34.41,25.65 C14.2 34.36,27.98 34.57,28.19 35.89,28.19 ; 35.89,28.19 36.88,29.18 36.88,41.67 C24.2 35.67,45.21 C25.2 35.88,45.49 37.79,47.4 v1(38.07,47.4) ; 35.89,28.19 36.7,28.19 39.27,25.63 52.25,25.63 54.71,28.09 54.71,32.55 L2.1 ; v1(37.22,65.32) 37.22,66.88 C15.2 38.48,67.46 ; 42.64,49.74 43.91,51 44.93,51 45.03,50.9 52.81,50.9 54.11,49.59 ; 55.75,47.88 59.18,44.45 C11.2 60.45,44.49 60.45,49.38 60.07,49.76 59.84,49.99 ; 59.11,61.98 59.49,62.36 59.49,65.81 60.31,66.63 C13.2 ; v1(57.86,65.32) 58.89,66.34 59.66,66.34
  BOTTOM w0.203: 38.07,64.49 38.15,64.41 38.15,48.46 38.13,48.44 38.13,47.92
  BOTTOM w0.762: 37.25,65.32 v1(57.86,65.32) ; 37.25,65.32 v1(37.22,65.32) ; 37.25,65.32 38.07,64.49 v1(38.07,47.4)
VDDA: length 25.3
  TOP w0.254: 53.12,43.33 U1.22
  TOP w0.381: 57.81,38.15 58.53,38.15 59.49,39.12 59.49,40.26 58.48,41.27 55.17,41.27 53.12,43.33 ; 57.81,38.15 56.2,38.15 R16.2 ; 57.81,38.15 58.95,37.01 C17.2 58.8,35.57 C16.1 56.23,35.52 L2.2
ANTI_TAMPER: length 57.7
  TOP w0.203: J3.6 8.27,14.72 11.6,14.72 15.96,19.09 R1.1 19.94,21.16 v1(20.35,20.75) ; U1.7 45.62,43.73 45.97,43.38 v1(45.97,42.82)
  BOTTOM w0.203: v1(45.97,42.82) 45.75,42.6 45.75,42.56 24.7,21.51 21.11,21.51 v1(20.35,20.75)
AUDIO_PWM: length 45.3
  TOP w0.203: U1.95 36.84,51.79 v1(34.95,49.89)
  BOTTOM w0.203: v1(34.95,49.89) 33.98,49.89 27.13,43.04 27.13,40.2 16.75,29.82 8.13,29.82 J3.18
BOOT0: length 25
  TOP w0.203: R6.1 27.38,49.62 v1(27.38,44.4) ; v1(33.43,50.32) 34.48,50.32 36.45,52.29 U1.94
  BOTTOM w0.203: v1(33.43,50.32) 32.64,50.32 27.38,45.06 v1(27.38,44.4)
CAN_RX: length 146.5
  TOP w0.203: R30.1 48.31,71.15 43,71.15 36.3,77.85 23.67,77.85 v1(23.37,78.16) ; U1.97 37.73,50.79 35.53,48.59 35.52,48.59 v1(35.13,48.2) ; 33.94,61.87 33.94,61.74 36.8,58.88 37.1,58.88 37.2,58.79 U1.81 ; 33.94,61.87 33.94,61.93 33.7,62.16 v1(33.7,62.72) ; 33.94,61.87 33.89,61.93 30.56,61.93 30.15,61.52 30.15,57.94 29.01,56.79 29.01,43.1 28.66,42.75 28.66,42.73 v1(28.27,42.34)
  BOTTOM w0.203: v1(35.13,48.2) 33.7,48.2 29.06,43.56 29.06,42.14 ; J3.16 8.05,27.2 12.98,27.2 13.05,27.27 13.15,27.27 13.34,27.46 15.8,27.46 29.06,40.72 29.06,42.14 ; v1(28.27,42.34) 28.84,42.34 29.05,42.14 29.06,42.14 ; 23.43,79.11 23.74,78.8 23.74,73.36 32.75,64.35 32.75,64.11 33.15,63.71 33.15,63.27 v1(33.7,62.72) ; 23.43,79.11 23.37,79.05 v1(23.37,78.16) ; 23.43,79.11 19.65,82.89 19.65,91.94 J4.8
CAN_TX: length 206.5
  TOP w0.203: U1.82 36.82,58.29 34.6,60.5 33.53,60.5 ; v1(29.69,41.91) 29.69,42.46 29.41,42.74 29.41,56.54 30.58,57.71 30.58,60.15 30.94,60.5 33.53,60.5 ; v1(35.18,47.35) 35.57,47.74 35.62,47.74 38.17,50.29 U1.98 ; 33.53,60.5 v1(33.53,61.24) ; v1(77.77,94.44) 86.82,94.44 87.53,93.73 87.53,86.23 87.55,86.21 87.55,85.69 87.53,85.67 87.53,84.51 87.25,84.23 87.25,80.18 85.79,78.71 85.76,78.71 85.52,78.48 85.52,72.47 85.08,72.02 R29.1
  BOTTOM w0.203: 30.01,40.96 30.01,41.59 v1(29.69,41.91) ; 30.01,40.96 15.08,26.04 13.59,26.04 13.57,26.01 13.05,26.01 13.03,26.04 J3.15 ; 30.01,40.96 30.76,41.71 30.76,44.55 33.56,47.35 v1(35.18,47.35) ; v1(33.53,61.24) 32.84,61.93 32.84,63 32.72,63.13 32.72,63.57 32.34,63.94 32.34,64.05 23.24,73.15 23.24,76.91 18.26,81.89 J4.5 19.24,91.53 19.24,92.1 19.58,92.45 19.58,93.9 20.12,94.44 v1(77.77,94.44)
DBGACK: length 5.9
  TOP w0.203: J10.19 12.7,73.21 13.06,73.57 13.06,76.35 12.4,77.01 R17.2
DBGRQ: length 11.7
  TOP w0.203: R15.2 14.71,76.29 14.71,71.55 J10.17
E5V: length 17.3
  TOP w0.203: 52.37,10.85 C4.1
  TOP w0.762: U3.3 59.8,16.47 56.29,12.95 53.64,12.95 52.85,12.16 C4.1 ; J6.1 50.76,9.25 52.37,10.85
IRDA_RX: length 43.8
  TOP w0.203: v1(33.85,64.48) 34.75,63.58 34.75,62.14 37.1,59.79 U1.79
  BOTTOM w0.203: J4.10 22.07,91.82 22.07,83.77 24.74,81.1 24.74,73.78 33.85,64.66 v1(33.85,64.48)
IRDA_TX: length 40
  TOP w0.203: U1.78 37.18,60.29 35.16,62.31 v1(35.16,64.33)
  BOTTOM w0.203: J4.9 23.34,89.47 23.16,89.29 23.16,85.27 25.24,83.19 25.24,73.98 34.5,64.72 34.77,64.72 v1(35.16,64.33)
JOY_DOWN: length 137.7
  TOP w0.203: v1(81.08,59.51) 81.63,59.51 83.29,61.17 83.29,66.79 86.39,69.88 86.39,78.16 88.06,79.84 88.06,81.24 88.27,81.44 88.27,84.1 89.23,85.06 J2.22 ; U1.61 49.62,66.73 49.74,66.85 v1(49.74,67.17) ; R28.1 76.15,62.53 v1(79.12,59.56) ; U1.45 60.72,58.79 v1(63.55,61.62)
  BOTTOM w0.203: 78.99,58.79 76.16,61.62 v1(63.55,61.62) ; 78.99,58.79 81.8,58.79 ; 78.99,58.79 79.12,58.92 v1(79.12,59.56) ; 81.8,58.79 v1(81.08,59.51) ; 81.8,58.79 84.57,58.79 87.86,62.08 89.37,62.08 89.5,62.2 J2.4 ; v1(49.74,67.17) 49.74,67.72 50.04,68.02 50.04,69.93 57.14,77.02 73.46,77.02 81.5,85.06 J2.22
JOY_SEL: length 119
  TOP w0.203: v1(87.15,58.42) 87.15,58.97 87.27,59.1 87.27,77.9 88.87,79.5 88.87,80.9 89.74,81.76 89.81,81.76 J2.20 ; U1.43 61.65,57.79 v1(63.58,59.72) ; R27.1 54.48,71.32 52.9,71.32 v1(51.33,69.75) 51.33,69.19 51.34,69.18 51.34,67.45 51.08,67.2 51.08,67.04 50.62,66.58 U1.59
  BOTTOM w0.203: v1(51.33,69.75) 57.6,76.02 73.87,76.02 80.38,82.52 J2.20 ; 87.13,57.79 88.7,57.79 J2.2 ; 87.13,57.79 87.03,57.88 84.97,57.88 84.88,57.98 78.66,57.98 76.92,59.72 v1(63.58,59.72) ; 87.13,57.79 87.15,57.81 v1(87.15,58.42)
JOY_UP: length 116.8
  TOP w0.203: v1(88.85,51.36) 88.85,53.96 89.05,54.16 89.05,57.53 89.05,75.92 J2.16 ; v1(63.56,55.97) 63.39,55.79 U1.39 ; U1.55 52.62,66.28 52.71,66.37 52.71,66.52 54.05,67.87 54.05,69.06 v1(55.4,70.41) 55.8,70.82 58.33,70.82 R31.1
  BOTTOM w0.203: v1(55.4,70.41) 59.01,74.02 74.7,74.02 78.13,77.44 J2.16 ; v1(63.56,55.97) 63.74,55.79 71.69,55.79 73.2,54.28 82.27,54.28 85.88,50.67 88.16,50.67 ; 88.16,50.67 89.92,50.67 J1.26 ; 88.16,50.67 v1(88.85,51.36)
LCD_BACKLIGHT: length 38
  TOP w0.203: U1.67 46.62,68.04 45.6,69.06 45.5,69.06 v1(45.11,69.45) 43.37,69.45 TP1.1
  BOTTOM w0.203: v1(45.11,69.45) 45.11,76.71 36.04,85.78 J4.19
LCD_CLK: length 45.7
  TOP w0.203: U1.52 54.12,66.21 56.04,68.13 56.04,68.16 v1(56.74,68.86)
  BOTTOM w0.203: v1(56.74,68.86) 60.68,72.8 78.97,72.8 79.68,73.52 91.96,73.52 J2.11
LCD_DI: length 48.2
  TOP w0.203: v1(54.89,68.83) 54.46,68.4 54.46,67.7 53.12,66.36 U1.54
  BOTTOM w0.203: v1(54.89,68.83) 59.67,73.61 74.87,73.61 77.32,76.06 91.96,76.06 J2.13
LCD_DO: length 44
  TOP w0.203: v1(55.78,68.83) 55.15,68.2 55.15,67.82 53.62,66.29 U1.53
  BOTTOM w0.203: v1(55.78,68.83) 60.16,73.21 78.66,73.21 80.36,74.9 J2.14
LCD_RS: length 95.1
  TOP w0.203: v1(63.62,55.12) 63.06,55.12 62.89,55.29 U1.38 U1.88 v1(33.4,55.29)
  BOTTOM w0.203: J1.25 92.46,50.67 92.46,50.42 92.24,50.2 85.23,50.2 81.81,53.62 72.77,53.62 71.1,55.29 63.79,55.29 v1(63.62,55.12) ; J3.28 9.53,43.92 19.94,43.92 31.31,55.29 v1(33.4,55.29)
LCD_WR: length 131.7
  TOP w0.203: v1(49.41,68.38) 49.41,67.73 49.11,67.43 49.11,66.91 49.12,66.9 U1.62 ; J2.23 91.82,86.31 89.9,86.31 87.86,84.27 87.86,81.61 87.66,81.4 87.66,80.01 85.96,78.31 85.94,78.31 85.93,78.29 85.93,70 81.87,65.95 v1(81.87,61.16) ; U1.46 60.31,59.29 v1(63.62,62.61)
  BOTTOM w0.203: J2.23 91.96,86.45 88.81,86.45 88.65,86.61 82.34,86.61 73.25,77.52 57.06,77.52 49.41,69.87 v1(49.41,68.38) ; v1(81.87,61.16) 81.36,60.66 ; 81.36,60.66 80.9,60.66 78.95,62.61 v1(63.62,62.61) ; 81.36,60.66 83.24,60.66 86.06,63.47 91.85,63.47 J2.5
LED1: length 44.9
  TOP w0.203: R18.1 50.32,90.45 v1(43.74,83.87) ; v1(48.75,69.85) 48.75,67.64 48.62,67.51 U1.63
  BOTTOM w0.203: J4.23 40.36,89.79 40.36,84 40.92,83.43 42.6,83.43 ; 42.6,83.43 43.03,83.87 v1(43.74,83.87) ; 42.6,83.43 48.62,77.41 48.62,69.98 v1(48.75,69.85)
LED2: length 51.4
  TOP w0.203: v1(47.91,69.72) 48.12,69.51 U1.64 ; R19.1 52.22,93.14 43.59,84.51 39.6,84.51 v1(39.32,84.79)
  BOTTOM w0.203: v1(47.91,69.72) 47.91,75.82 39.83,83.9 39.83,85.29 ; 39.83,85.29 39.83,91.85 J4.22 ; 39.83,85.29 v1(39.32,84.79)
LED3: length 77.7
  TOP w0.203: v1(46.88,69.84) 47.62,69.09 U1.65 ; v1(39.01,86.72) 39.29,86.44 44.37,86.44 49.61,91.68 49.61,92.9 51.57,94.87 75.65,94.87 77.1,93.42 77.13,93.42 77.79,92.76 R20.1
  BOTTOM w0.203: 38.58,87.88 38.58,84.57 46.88,76.27 v1(46.88,69.84) ; 38.58,87.88 J4.21 ; 38.58,87.88 39.01,87.45 v1(39.01,86.72)
LED4: length 83.6
  TOP w0.203: v1(45.95,69.8) 47.12,68.63 U1.66 ; v1(37.54,86.94) 38.46,86.03 44.54,86.03 50.01,91.51 50.01,92.74 51.74,94.46 75.48,94.46 76.81,93.13 76.81,92.85 76.54,92.57 76.54,92.28 R21.1
  BOTTOM w0.203: v1(45.95,69.8) 45.95,76.53 37.21,85.27 37.21,87.27 ; 37.21,87.27 v1(37.54,86.94) ; 37.21,87.27 37.21,91.92 J4.20
MC_BUSVOLTAGE: length 43.8
  TOP w0.203: v1(58.32,47.55) 58.32,48.51 57.54,49.29 U1.26
  BOTTOM w0.203: J1.13 92.05,35.03 88.47,35.03 79.93,43.57 73.36,43.57 73.34,43.59 66.9,43.59 64.79,45.7 64.77,45.7 62.92,47.55 v1(58.32,47.55)
MC_CURRENTA/BNC: length 54.6
  TOP w0.203: v1(50.13,43.08) 50.13,43.63 50.12,43.64 U1.16
  BOTTOM w0.203: J1.7 91.96,27.32 65.89,27.32 v1(50.13,43.08)
MC_CURRENTB: length 50.2
  TOP w0.203: U1.17 50.62,43.56 v1(51.08,43.1)
  BOTTOM w0.203: v1(51.08,43.1) 65.61,28.58 88.48,28.58 88.48,28.57 J1.8
MC_CURRENTC: length 51.9
  TOP w0.203: U1.18 51.12,44.64 51.26,44.49 v1(51.26,43.94)
  BOTTOM w0.203: v1(51.26,43.94) 62.74,32.46 84.28,32.46 86.78,29.96 92.06,29.96 J1.9
MC_DISSIPATIVEBRAKE: length 127.4
  TOP w0.203: U1.44 61.19,58.29 v1(63.55,60.66) ; v1(85.64,58.97) 85.64,59.52 85.67,59.56 85.67,68.6 86.79,69.72 86.79,77.95 86.87,78.03 86.87,78.07 88.47,79.67 88.47,81.07 88.67,81.27 88.67,82.58 89.99,83.9 91.95,83.9 J2.21 ; v1(50.71,68.91) 50.71,68.36 50.57,68.22 50.57,67.1 50.12,66.65 U1.60
  BOTTOM w0.203: 85.14,58.29 86.08,58.29 88.61,60.82 91.73,60.82 J2.3 ; 85.14,58.29 85.04,58.38 78.83,58.38 76.55,60.66 v1(63.55,60.66) ; 85.14,58.29 85.6,58.75 85.6,58.93 v1(85.64,58.97) ; v1(50.71,68.91) 50.7,68.92 50.7,70.01 57.21,76.52 73.67,76.52 81.04,83.9 91.95,83.9 J2.21
MC_ENA/WAKEUP: length 45.6
  TOP w0.203: v1(54.99,43.18) 53.62,44.55 U1.23
  BOTTOM w0.203: J1.10 87.17,31.11 82.18,36.11 62.06,36.11 v1(54.99,43.18)
MC_ENB: length 47.2
  TOP w0.203: v1(55.85,43.38) 54.12,45.12 U1.24
  BOTTOM w0.203: J1.11 92.06,32.5 87.39,32.5 83.28,36.61 62.63,36.61 v1(55.85,43.38)
MC_ENINDEX: length 42.8
  TOP w0.203: v1(56.67,43.81) 54.62,45.86 U1.25
  BOTTOM w0.203: J1.12 88.63,33.66 88.33,33.96 87.48,33.96 84.33,37.11 75.97,37.11 69.9,43.18 57.3,43.18 v1(56.67,43.81)
MC_HEATSINKTEMPERATURE: length 53.1
  TOP w0.203: v1(49.91,42.11) 49.5,42.51 49.5,44.17 49.62,44.28 U1.15
  BOTTOM w0.203: v1(49.91,42.11) 50.46,42.11 66.53,26.04 90.68,26.04
MC_NTC: length 112.9
  TOP w0.203: v1(63.58,57.81) 62.56,56.79 U1.41 ; J2.18 88.27,77.67 88.27,77.56 88.24,77.53 88.24,57.44 88.16,57.37 88.16,55.8 v1(87.58,55.22) ; v1(52.76,69.67) 52.76,67.72 51.89,66.86 51.89,66.7 51.62,66.43 U1.57
  BOTTOM w0.203: J1.28 89.6,53.98 89.55,53.92 87.45,53.92 ; v1(87.58,55.22) 87.58,54.23 87.45,54.1 87.45,53.92 ; 87.45,53.92 86.12,53.92 84.18,55.86 83.84,55.86 82.54,57.16 78.32,57.16 77.67,57.81 v1(63.58,57.81) ; J2.18 86.64,79.98 86.62,79.96 79.23,79.96 77.76,78.5 74.29,75.02 58.1,75.02 v1(52.76,69.67)
MC_PFCPWM: length 37.6
  TOP w0.203: U1.36 62.98,54.29 63.19,54.08 64.39,54.08 v1(65.15,53.31)
  BOTTOM w0.203: v1(65.15,53.31) 65.7,53.31 65.73,53.34 69.11,53.34 74.98,47.47 84.55,47.47 84.58,47.45 85.1,47.45 85.12,47.47 89.56,47.47 J1.22
MC_PFCSYNC1: length 41
  TOP w0.203: v1(65.15,52.4) 63.88,53.67 63.02,53.67 62.9,53.79 U1.35
  BOTTOM w0.203: v1(65.15,52.4) 69.35,52.4 74.77,46.97 86.33,46.97 87.94,45.36 87.94,45.36 88.19,45.11 91.97,45.11 J1.21
MC_PFCSYNC2: length 121.2
  TOP w0.203: 34.77,59.39 34.77,59.39 v1(34.29,59.87) ; 34.77,59.39 33.62,59.39 33.55,59.46 33.03,59.46 32.96,59.39 31.64,59.39 31.24,58.98 31.24,57.79 29.92,56.47 29.92,42.95 30.95,41.92 30.95,39.66 v1(30.56,39.27) ; 34.77,59.39 36.27,57.88 37.1,57.88 37.2,57.79 U1.83 ; U1.1 42.62,44.94 v1(41.07,43.4)
  BOTTOM w0.203: J4.6 17.11,91.94 17.11,81.98 22.74,76.35 22.74,72.95 31.93,63.75 31.93,63.12 31.99,63.07 31.99,61.84 32.62,61.21 32.66,61.21 33.61,60.26 33.9,60.26 v1(34.29,59.87) ; v1(30.56,39.27) 30.89,38.94 30.89,38.61 ; J3.14 8.1,24.71 11.81,24.71 11.94,24.59 16.94,24.59 20.35,27.99 20.35,28.07 30.89,38.61 ; v1(41.07,43.4) 37.96,40.28 32.56,40.28 30.89,38.61
MC_UH: length 121.1
  TOP w0.203: U1.40 63,56.29 v1(63.6,56.9) ; J2.17 91.82,78.69 89.97,78.69 88.64,77.37 88.64,57.26 88.64,54.58 87.91,53.84 v1(87.91,53.29) ; U1.56 52.12,66.35 52.3,66.53 52.3,66.69 53.29,67.68 53.29,69.22 v1(53.82,69.75)
  BOTTOM w0.203: v1(63.6,56.9) 64.38,56.9 78.01,56.9 78.15,56.76 81.34,56.76 85.37,52.73 87.25,52.73 ; 87.25,52.73 87.81,53.29 v1(87.91,53.29) ; 87.25,52.73 91.97,52.73 J1.27 ; v1(53.82,69.75) 58.6,74.52 74.5,74.52 78.57,78.6 91.73,78.6 J2.17
MC_VH: length 123.4
  TOP w0.203: v1(87.3,56.82) 87.3,57.37 87.78,57.86 87.78,77.8 89.28,79.3 89.28,80.72 89.84,81.28 91.87,81.28 J2.19 ; v1(63.58,58.78) 62.09,57.29 U1.42 ; v1(51.97,69.06) 51.97,67.51 51.49,67.03 51.49,66.87 51.12,66.5 U1.58
  BOTTOM w0.203: v1(87.3,56.82) 87.71,56.41 87.76,56.41 87.83,56.34 ; J2.1 90.09,56.64 90.09,56.52 89.89,56.31 89.13,56.31 89.1,56.34 87.83,56.34 ; v1(51.97,69.06) 51.97,69.78 57.71,75.52 74.08,75.52 79.79,81.22 91.82,81.22 J2.19 ; 87.83,56.34 85.88,56.34 84.64,57.57 78.49,57.57 77.28,58.78 v1(63.58,58.78)
MIC_IN: length 38.2
  TOP w0.203: U1.34 62.83,53.29 62.85,53.27 62.94,53.27 64.68,51.52 v1(65.24,51.52)
  BOTTOM w0.203: v1(65.24,51.52) 69.52,51.52 74.57,46.47 85.05,46.47 86.4,45.12 86.4,45.12 86.77,44.75 86.77,44.75 87.68,43.84 89.57,43.84 89.6,43.81 J1.20
MICROSDCARD_CS: length 41.8
  TOP w0.203: v1(33.88,63.55) 34.35,63.09 34.35,61.97 37.03,59.29 U1.80
  BOTTOM w0.203: v1(33.88,63.55) 33.15,64.28 33.15,64.65 24.24,73.57 24.24,79.67 20.8,83.11 J4.7
OSC_IN: length 21.9
  TOP w0.254: 48.08,41.79 48.1,41.81 48.1,47.52 U1.12
  TOP w0.381: 45.63,35.55 46.72,35.55 46.74,35.56 46.74,35.59 47.27,35.05 47.27,32.79 45.21,30.73 Y1.2 ; 45.63,35.55 C6.2 ; 45.63,35.55 47.22,37.13 47.22,40.07 R7.1 47.38,41.06 48.08,41.75 48.08,41.79
OSC_OUT: length 21.8
  TOP w0.203: C9.2 50.19,35.97
  TOP w0.254: U1.13 48.62,41.81 48.66,41.76
  TOP w0.381: C9.2 49.82,35.13 48.08,35.13 48.08,32.74 50.09,30.73 Y1.1 ; 48.66,41.76 49.03,41.39 R7.2 49.1,40.17 49.1,37.34 50.19,36.25 50.19,35.97
PA4: length 42.8
  TOP w0.203: v1(63.72,47.64) 60.57,50.79 U1.29
  BOTTOM w0.203: v1(63.72,47.64) 64.27,47.64 64.28,47.65 69.85,47.65 73.53,43.97 82.11,43.97 88.54,37.54 92.02,37.54 J1.15
PA5: length 39.5
  TOP w0.203: U1.30 61.07,51.29 v1(63.88,48.48)
  BOTTOM w0.203: v1(63.88,48.48) 64.44,48.48 64.45,48.46 69.75,48.46 73.74,44.47 82.64,44.47 87.46,39.65 89.76,39.65 J1.16
PA6: length 42.2
  TOP w0.203: v1(66.47,49.09) 64.24,49.09 61.54,51.79 U1.31
  BOTTOM w0.203: J1.17 92,40.06 87.63,40.06 82.71,44.97 74.03,44.97 69.91,49.09 v1(66.47,49.09)
PA7: length 38.9
  TOP w0.203: v1(65.35,49.78) 64.67,49.78 62.16,52.29 U1.32
  BOTTOM w0.203: v1(65.35,49.78) 69.84,49.78 74.15,45.47 82.85,45.47 87.05,41.27 J1.18
PA9: length 59.9
  TOP w0.203: R13.1 12.31,86.59 13.69,86.59 14,86.28 30.99,86.28 31.93,87.22 31.93,88.11 32.33,88.51 33.53,88.51 33.61,88.6 v1(34.24,88.6) ; v1(45.52,68.25) 46.12,67.65 U1.68
  BOTTOM w0.203: 34.85,88.67 34.85,86.29 43.35,77.79 43.35,70.32 44.81,68.85 44.91,68.85 v1(45.52,68.25) ; 34.85,88.67 34.77,88.6 v1(34.24,88.6) ; 34.85,88.67 34.85,91.74 J4.18
PA10: length 55.6
  TOP w0.203: v1(32.92,87.88) 32.92,87.33 31.41,85.83 13.64,85.83 12.8,84.99 R12.1 ; v1(44.42,68.17) 45.59,67 45.62,67 U1.69
  BOTTOM w0.203: v1(44.42,68.17) 42.85,69.75 42.85,77.58 33.76,86.68 33.76,87.48 33.5,87.73 ; v1(32.92,87.88) 33.07,87.73 33.5,87.73 ; 33.5,87.73 J4.17
PA11: length 35.9
  TOP w0.203: U1.70 45.12,66.49 v1(43.36,68.25)
  BOTTOM w0.203: v1(43.36,68.25) 42.38,69.23 42.38,77.35 32.18,87.55 32.18,91.87 J4.16
PA12: length 33.2
  TOP w0.203: v1(42.37,68.28) 44.62,66.02 U1.71
  BOTTOM w0.203: J4.15 30.96,88.06 41.98,77.04 41.98,68.67 v1(42.37,68.28)
PA13: length 72.8
  TOP w0.203: v1(26.37,63.67) 26.37,64.26 32.76,70.66 39.84,70.66 41.4,69.09 v1(41.4,68.22) 44.12,65.51 U1.72
  BOTTOM w0.203: v1(26.37,63.67) 20.79,63.67 13.97,56.85 J10.7 ; v1(41.4,68.22) 41.4,76.91 29.64,88.67 29.64,91.87 J4.14
PA14: length 64.2
  TOP w0.203: v1(35.81,65.96) 36.21,65.57 36.21,62.5 37.41,61.29 U1.76 ; v1(27.69,64.49) 28.08,64.88 28.08,65.24 32.37,69.53 32.53,69.53 v1(32.92,69.93)
  BOTTOM w0.203: J4.11 25.88,89.47 26.24,89.12 26.24,74.4 31,69.63 32.25,69.63 32.64,69.24 33.1,69.24 ; 33.1,69.24 33.1,69.75 v1(32.92,69.93) ; 33.1,69.24 33.56,68.78 33.56,68.77 35.81,66.52 v1(35.81,65.96) ; 25.43,64.36 25.55,64.36 ; 25.43,64.36 19.81,64.36 14.83,59.39 J10.9 ; 25.43,64.36 25.48,64.41 25.5,64.41 25.55,64.36 ; 25.55,64.36 27.56,64.36 v1(27.69,64.49)
PA15: length 69.3
  TOP w0.203: v1(35.17,65.4) 35.8,64.77 35.8,62.24 37.25,60.79 U1.77 ; v1(32.59,68.48) 32.59,67.92 32.32,67.66 32.13,67.66 27.72,63.26 27.62,63.26 27.54,63.18 27.26,63.18 v1(26.87,62.79)
  BOTTOM w0.203: v1(35.17,65.4) 34.62,65.4 34.61,65.41 34.52,65.41 32.33,67.59 ; J4.12 24.66,91.87 24.66,85.27 25.74,84.19 25.74,74.19 32.33,67.59 ; 32.33,67.59 32.33,67.72 32.59,67.97 v1(32.59,68.48) ; v1(26.87,62.79) 26.32,62.79 26.24,62.87 26.19,62.87 25.98,63.07 21.46,63.07 J10.5
PB2: length 43.5
  TOP w0.203: v1(71.98,52.5) 74.17,54.69 R4.2 ; v1(65.13,54.23) 65.07,54.23 64.82,54.49 63.36,54.49 63.13,54.71 62.89,54.71 62.81,54.79 U1.37
  BOTTOM w0.203: 70.76,52.5 v1(71.98,52.5) ; 70.76,52.5 74.63,48.64 84.5,48.64 85.04,49.17 85.97,49.17 86.46,48.69 86.49,48.69 86.54,48.64 88.72,48.64 88.98,48.9 90.68,48.9 ; 70.76,52.5 69.04,54.23 v1(65.13,54.23)
